# Allegro board FEMA_RF_Board.brd
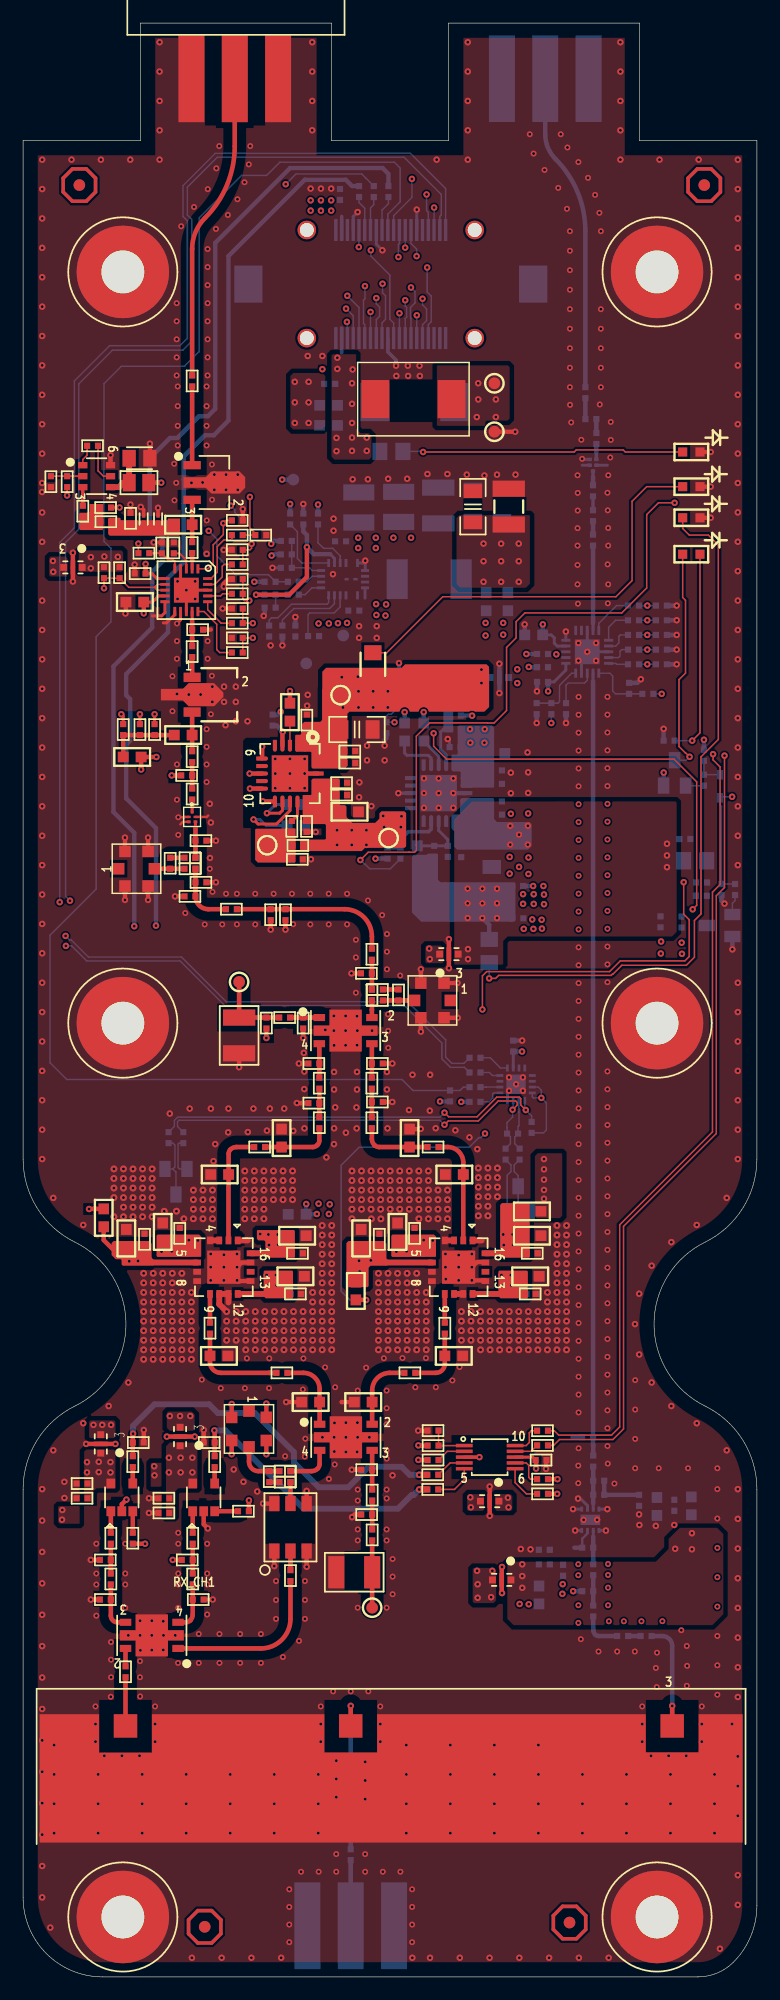
[diagram p0: board, top side]
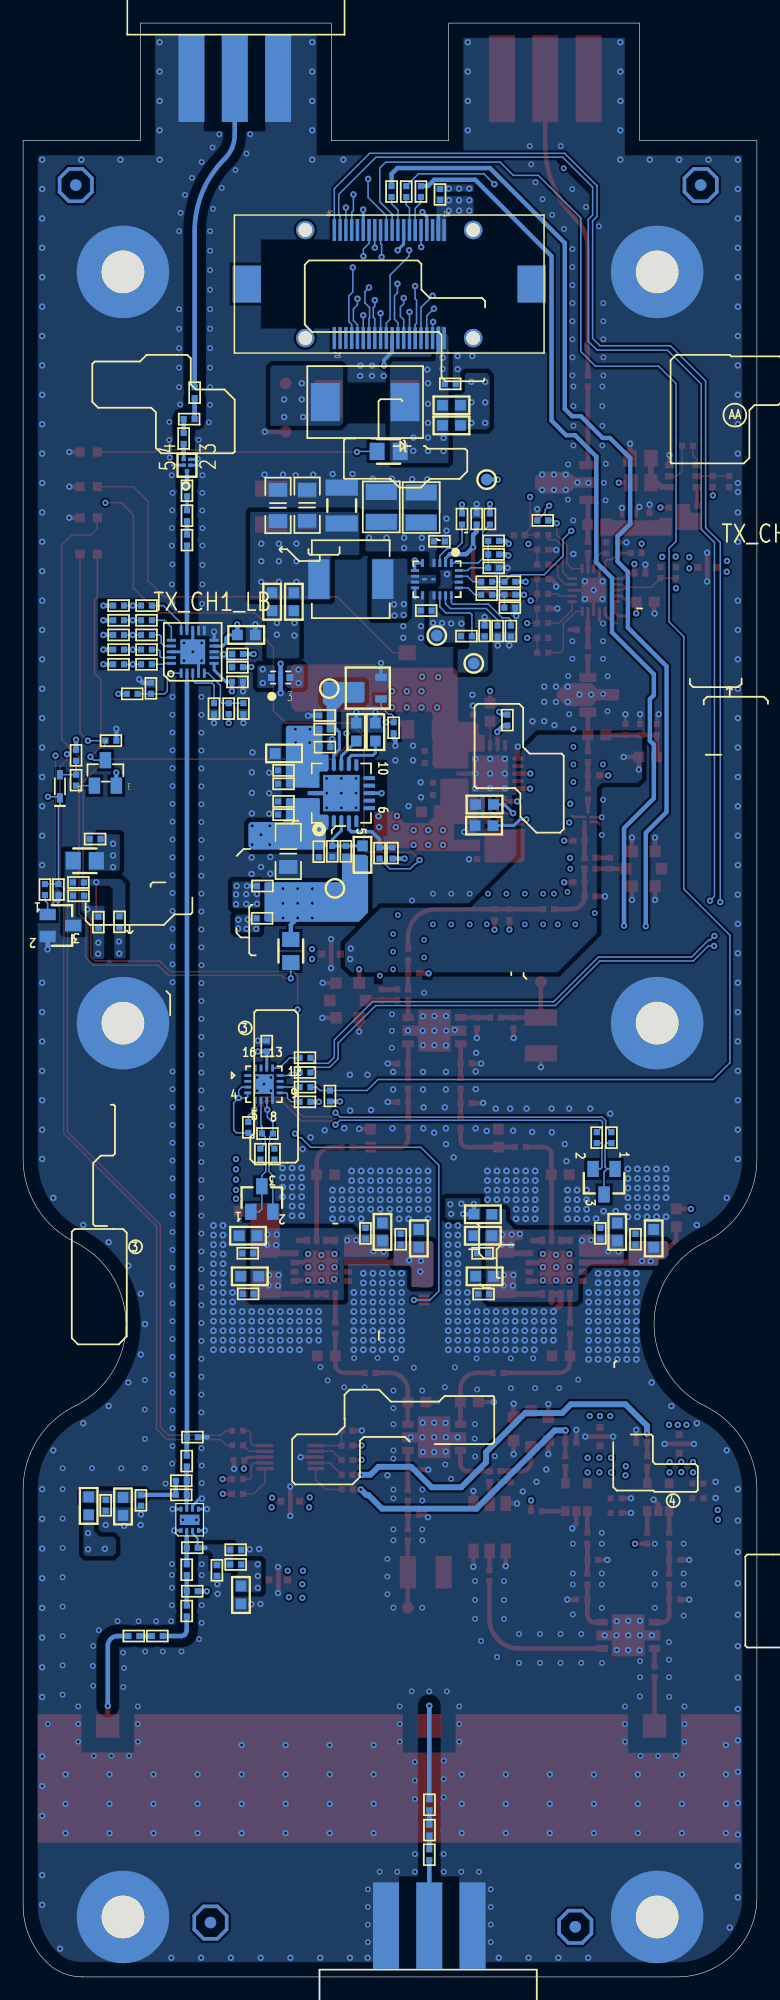
[diagram p1: board, bottom side, seen from below]

Outline 63.5 x 169 mm; copper layers: TOP, L2-GND1, L3-SIG1, L4-SIG2, L5-PWR, BOTTOM. Coordinates in mm from the lower left corner of the outline.
Outline path: 0,158.84 0,70.74 arc(1.21,66.51) 4.48,63.56 arc(8.9,56.47) 4.48,49.37 arc(1.21,46.42) 0,42.19 0,6.88 arc(2.01,2.01) 6.88,0 58.4,0 arc(60.06,0.33) 61.47,1.27 arc(62.97,3.52) 63.5,6.18 63.5,6.18 63.5,42.19 arc(62.29,46.42) 59.02,49.37 arc(54.6,56.47) 59.02,63.56 arc(62.29,66.51) 63.5,70.74 63.5,158.84 53.34,158.84 53.34,169 36.83,169 36.83,158.84 26.67,158.84 26.67,169 10.16,169 10.16,158.84 0,158.84

## Design rules (mm)
net group DP1: nets UNNAMED_101_NPN_I19_B UNNAMED_101_NPN_I19_E
net group DP3: nets UNNAMED_101_NPN_I2_B UNNAMED_101_NPN_I2_E
net group N18611317: nets N18611317 N18611323
net group 55OHM: nets LDO_5V_PG N3404767 N3408271 N3470417 N3470429 N3470503 N3470519 N3470531 N3470539 N3470663 N3470683 N17928744 N18469443 N18558711 N18558734 N18558744 N18611272 N18611312 N18611333 N18874039 N19046935 N19046998 N19047009 N19047068 N20365150 N20365219 N20365249 N20456126 N20456131 N20456136 N20456141 N20456197 N20456216 N20456296 N20458116 N20458145 N20458186 N20469972 N20476140 N20480124 N20480158 N20480184 N20480233 N20480260 N20480623 N20482043 N20482107 N20482447 N20482450 N20482724 N20482753 N20482870 N20482875 N20483231 N20489678 N20489681 N20489725 N20501837 N20501901 PA1_TX_EN PA2_TX_EN PA_EN_CNTRL PG_LDO_3P3 PG_LDO_5V PG_REG_5P7V PGA_PWR_DISABLE RF_PWR_DISABLE RF_THERMTRIP RX_ATTN_1DB RX_ATTN_2DB RX_ATTN_4DB RX_ATTN_8DB RX_ATTN_P5DB RX_ATTN_P16DB RX_NC TWI1_SCL TWI1_SDA TWI2_SCL TWI2_SDA TX_ATTN_1DB TX_ATTN_2DB TX_ATTN_4DB TX_ATTN_8DB TX_ATTN_ENB TX_ATTN_P5DB TX_ATTN_P16DB TX_NC
net group DP2: nets N20480154
net group POWER: nets 3P3V_PGA LT8640_INT_VCC N3406525 N18610577 RF_DET_F_OUT RF_DET_R_OUT
net group QWR: nets RF_RX_OUT RX_FILTER_IN RX_FILTER_OUT RX_RF_IN RX_SAWIN RX_SAWOUT
net group RF: nets N2442693 N2442695 N2442709 N2442711 N2442719 N2442759 N2442761 N2442775 N2442777 N2442783 N2442823 N2442825 N2442833 N2442881 N2442885 N2442965 N2442977 N2452276 N2452306 N2452334 N2452522 N3404619 N3406573 N3490489 N17646328 N17646554 N17673785 N18610572 N18610670 N19122168 N19122434 N19173620 N19173696 N19196616 N19638038 N19640647 N19645111 N19646465 N19674332 N19674512 N20449161 N20449168 N20449298 N20449320 N20460527 N20476316 PA_CON RF_CON RF_CON_C RF_CPL_OUT RF_DET_FWR_IN RF_DET_REV_IN RF_INTANT RF_INTANT_C RF_OUT RX_ATTN_IN RX_ATTN_OUT RX_LNA_IN RX_LNA_OUT TX_ATT_IN TX_ATT_OUT TX_PA_OUT TX_PREAMP_OUT TX_RF_IN TX_RF_IN_18614129 TX_RF_IN_C TX_RF_OUT

## Placement (name value [footprint] x y rotation side)
C16  0.1uF  [C0402]  44.82 44.7 180 top
C67  NFM18PC225B1A3D  [EMIFIL_NFM18PC225B1A3B]  41.22 112.39 180 bottom
C1506  1000pF  [C0201]  10.43 126.11 90 top
C1519  100nF  [C0201]  11.68 126.11 90 top
C2215  33pF  [C0402]  14.63 123.63 90 top
C2224  10000pF  [C0603]  9.67 118.92 180 top
C2230  10pF  [C0402]  18.03 92.35 0 top
C2233  2.7PF  [C0402]  21.42 91.88 270 top
C2237  47pF  [C0402]  14.63 102.32 270 top
C2240  2.2uF  [C0402]  8.66 107.89 90 top
C2241  10pF  [C0402]  10.11 107.89 90 top
C2242  0.1uF  [C0402]  11.38 107.89 90 top
C2400  10uF  [C0603]  29.25 63.88 90 bottom
C2401  2.2uF  [C0402]  30.83 63.8 90 bottom
C2402  10000pF  [C0603]  29.25 63.88 90 top
C2403  33pF  [C0402]  30.83 63.8 90 top
C2404  33pF  [C0402]  43.88 59.07 0 top
C2405  10000pF  [C0603]  43.88 60.6 0 top
C2406  2.2uF  [C0402]  44.03 59.08 0 bottom
C2407  10uF  [C0603]  43.88 60.6 0 bottom
C2410  100pF  [C0402]  35.48 71.78 0 top
C2411  12pF  [C0402]  33.47 52.25 180 top
C2413  10000pF  [C0603]  37.32 69.41 180 top
C2414  10000pF  [C0603]  37.27 53.72 0 top
C2415  33pF  [C0402]  33.87 64.31 90 top
C2416  10000pF  [C0603]  32.4 64.44 90 top
C2417  2.2uF  [C0402]  33.87 64.31 90 bottom
C2418  10uF  [C0603]  32.4 64.44 90 bottom
C2419  10uF  [C0603]  8.93 63.88 90 bottom
C2420  2.2uF  [C0402]  10.51 63.8 90 bottom
C2421  10000pF  [C0603]  8.93 63.88 90 top
C2422  33pF  [C0402]  10.51 63.8 90 top
C2423  33pF  [C0402]  23.74 62.59 0 top
C2424  10000pF  [C0603]  23.71 64.11 0 top
C2425  2.2uF  [C0402]  23.74 62.59 0 bottom
C2426  10uF  [C0603]  23.71 64.11 0 bottom
C2432  10000pF  [C0603]  17.01 69.41 180 top
C2433  10000pF  [C0603]  16.95 53.72 0 top
C2435  33pF  [C0402]  23.56 59.07 0 top
C2436  10000pF  [C0603]  23.56 60.6 0 top
C2437  2.2uF  [C0402]  23.65 59.07 0 bottom
C2438  10uF  [C0603]  23.56 60.6 0 bottom
C2439  100pF  [C0402]  20.47 71.78 180 top
C2500  100pF  [C0402]  53.3 41.22 90 bottom
C2501  10000pF  [C0603]  54.86 40.69 270 bottom
C2610  100pF  [C0402]  5.1 42.67 180 top
C2612  33pF  [C0402]  9.97 46.22 0 top
C2613  100pF  [C0402]  12.18 41.4 180 top
C2615  33pF  [C0402]  16.1 46.22 180 top
C3500  10uF  [CAPC3225X270N]  29.05 127.1 90 bottom
C3501  10uF  [CAPC3225X270N]  32.5 127.15 90 bottom
C3502  1uF  [C0402]  27.47 124.18 180 bottom
C3503  0.1uF  [C0402]  25.52 126.11 90 bottom
C3504  1uF  [C0402]  28.62 118.19 0 bottom
C3505  22uF  [CC1210]  35.93 127.27 90 bottom
C3506  47uF  [C1206]  38.92 127.3 90 bottom
C3507  47uF  [C1206]  38.92 127.17 90 top
C3508  47uF  [C1206]  41.44 127.28 90 bottom
C3509  22uF  [CC1210]  42.03 127.18 90 top
C3510  1uF  [C0402]  24.25 126.11 90 bottom
C3511  0.1uF  [C0402]  21.29 116.41 270 bottom
C3512  10pF  [C0402]  22.78 124.21 180 bottom
C3600  10uF  [C0603]  40.91 105.83 0 bottom
C3604  10000pF  [C0603]  34.13 97.06 90 bottom
C3608  22uF  [C1206]  40.55 97.36 270 bottom
C3609  10uF  [C0603]  33.01 107.68 90 bottom
C3610  10000pF  [C0603]  34.67 107.68 90 bottom
C4100  10uF  [C0603]  28.25 100.78 0 top
C4104  10000pF  [C0603]  23.09 109.4 270 top
C4108  22uF  [C1206]  28.9 107.9 0 top
C4109  10uF  [C0603]  23.57 101.41 0 bottom
C4110  10000pF  [C0603]  23.61 99.58 0 bottom
C4200  0.1uF  [C0402]  57.27 98.42 0 bottom
C4317  4.7uF  [C0805]  10.07 131.36 180 top
C4393  47pF  [C0402]  8.86 26.39 270 top
C4401  47pF  [C0402]  28.34 14.88 270 bottom
C4413  10pF  [C0402]  30.66 84.46 0 top
C4414  10pF  [C0402]  22.66 43.75 180 top
C4421  100pF  [C0402]  36.49 56.11 270 top
C4422  100pF  [C0402]  16.17 56.11 270 top
C4425  10pF  [C0402]  14.63 138.05 270 top
C4447  47pF  [C0402]  30.18 84.94 270 top
C4449  47pF  [C0402]  23.14 34.71 270 top
C4465  10pF  [C0402]  14.44 95.85 180 top
C4470  12pF  [C0402]  22.4 52.25 0 top
C4478  10pF  [C0402]  28.35 10.57 270 bottom
C4488  47pF  [C0402]  23.14 43.27 270 top
C4499  100pF  [C0402]  49.34 44.62 270 bottom
C4500  20pF  [C0402]  49.34 35.22 270 bottom
C4501  33pF  [C0402]  48.86 33.36 180 bottom
C4502  68pF  [C0402]  46.73 35.17 270 bottom
C4504  1000pF  [C0402]  45.1 36.95 180 bottom
C4505  1.8pF  [C0402]  48.85 46.69 180 bottom
C4516  10000pF  [C0603]  44.65 33.03 270 bottom
C4519  100pF  [C0402]  14.63 114.64 270 top
C4520  100pF  [C0402]  14.63 105.55 270 top
C4522  100pF  [C0402]  30.21 38.23 270 top
C4523  47pF  [C0402]  7.59 37.94 90 top
C4524  47pF  [C0402]  14.68 37.94 90 top
C4530  47pF  [C0402]  53.92 29.48 0 bottom
C4531  100pF  [C0402]  49.61 133.07 270 bottom
C4532  100pF  [C0402]  49.32 128.55 270 bottom
C4533  100pF  [C0402]  49.32 124.28 270 bottom
C4540  100pF  [C0402]  48.66 137.03 270 bottom
C4569  0.1uF  [C0402]  37.91 97.33 270 bottom
C4570  0.1uF  [C0402]  40.96 100.53 0 bottom
C4571  0.1uF  [C0402]  40.96 101.68 0 bottom
C4572  0.1uF  [C0402]  37.38 106.38 180 bottom
C4573  0.1uF  [C0402]  40.96 103.2 0 bottom
C4574  0.1uF  [C0402]  40.96 104.36 0 bottom
C4581  0.1uF  [C0402]  24.53 99.52 270 top
C4582  0.1uF  [C0402]  27.56 103.29 0 top
C4583  0.1uF  [C0402]  27.56 102.23 0 top
C4584  0.1uF  [C0402]  24.55 108.71 90 top
C4585  0.1uF  [C0402]  28.27 106.04 0 top
C4586  0.1uF  [C0402]  28.27 105 0 top
C4625  47pF  [C0402]  28.34 12.7 270 bottom
C4630  10pF  [C0402]  49.13 134.75 180 bottom
C4631  10pF  [C0402]  49.32 126.39 90 bottom
C4638  47pF  [C0402]  51.89 29.48 0 bottom
C4641  18pF  [C0402]  9.29 126.17 90 top
C4643  18pF  [C0402]  10.13 121.39 180 top
C4645  0.1uF  [C0402]  5.1 41.4 180 top
C4646  0.1uF  [C0402]  12.18 40.13 180 top
C4650  18pF  [C0402]  56.35 40.79 270 bottom
C4665  18pF  [C0402]  15.1 116.54 0 top
C4666  18pF  [C0402]  14.15 103.92 180 top
C4671  1000PF  [C0402]  42.36 72.95 180 bottom
C4672  1000PF  [C0402]  44.01 73.48 270 bottom
C4682  10pF  [C0402]  14.44 96.8 0 top
C4685  10pF  [C0402]  30.66 85.41 0 top
C4686  10pF  [C0402]  22.66 42.8 0 top
C4730  33pF  [C0402]  13.55 64.31 90 top
C4731  10000pF  [C0603]  12.08 64.44 90 top
C4732  2.2uF  [C0402]  13.55 64.31 90 bottom
C4733  10uF  [C0603]  12.08 64.44 90 bottom
C4734  33pF  [C0402]  44.06 62.59 0 top
C4735  10000pF  [C0603]  44.03 64.11 0 top
C4736  2.2uF  [C0402]  44.06 62.59 0 bottom
C4737  10uF  [C0603]  44.03 64.11 0 bottom
C4738  NFM18PC225B1A3D  [EMIFIL_NFM18PC225B1A3B]  4.31 121.92 180 top
C4740  NFM18PC225B1A3D  [EMIFIL_NFM18PC225B1A3B]  40.38 41.15 180 top
C4741  NFM18PC225B1A3D  [EMIFIL_NFM18PC225B1A3B]  36.85 88.47 0 top
C4742  NFM18PC225B1A3D  [EMIFIL_NFM18PC225B1A3B]  41.42 34.34 180 top
C4743  18pF  [C0402]  44.95 112.01 180 bottom
C4744  10000pF  [C0603]  44.19 116.08 180 bottom
C4745  0.1uF  [C0402]  42.41 80.52 90 bottom
C4746  0.1uF  [C0402]  27.42 154.18 270 bottom
C4747  NFM18PC225B1A3D  [EMIFIL_NFM18PC225B1A3B]  6.72 46.1 90 top
C4748  NFM18PC225B1A3D  [EMIFIL_NFM18PC225B1A3B]  13.58 46.74 90 top
C4749  0.1uF  [C0402]  26.53 137.79 180 bottom
CON2  19S101-40ML5  [SMA_1P5_18X18_3N]  18.32 165.8 90 top
CON4  19S101-40ML5  [SMA_1P5_18X18_3N]  45.18 165.82 90 bottom
CON5  19S101-40ML5  [SMA_1P5_18X18_3N]  28.35 2.81 270 bottom
D5  B530C-13-F  [B530C_13_F]  33.9 136.22 180 bottom
D6  RB751S40T5G  [SOD523F_2P_1_30X0_90_0_70MM]  60.32 102.99 90 bottom
D10  SMDJ16CA  [SMDJ36CA]  33.77 136.47 180 top
D10116  LED  [LED_LTST-C190]  57.83 126.21 0 top
D10126  LED  [LED_LTST-C190]  57.83 131.9 0 top
D10127  LED  [LED_LTST-C190]  57.83 123.06 0 top
D10128  LED  [LED_LTST-C190]  57.83 128.91 0 top
FB2202  120E  [FB0603]  9.44 105.52 0 top
FB2400  120E  [FB0603]  44.03 66.22 180 top
FB2401  120E  [FB0603]  23.71 65.96 180 bottom
FB2500  120E  [FB0603]  57.83 40.74 90 bottom
FB3409  100E / 3A  [FB0603]  26.43 135.94 180 bottom
FB3410  100E / 3A  [FB0603]  26.43 134.2 180 bottom
FB3412  120E  [FB0603]  28.79 59.33 90 top
FB3413  120E  [FB0603]  6.98 65.66 270 top
FB6322  75E  [FB0402]  7.16 125.87 0 top
FB6332  100E / 3A  [FB0603]  41.95 118.95 270 bottom
FB6333  100E / 3A  [FB0603]  40.07 118.95 270 bottom
FL2503  FAR-F5KA-897M50-D4DC  [FLT_FAR-F6KA-1G5754-L4AJ]  49.32 130.76 90 bottom
FL2703  UPD008A  [FIL_CER0574A]  8.86 21.89 0 top
FL3310  SAFFB942MAN0F0A  [FIL_SAFFB942MAN0F0A]  14.63 100.34 270 top
J20  FX23L-50-P-0.5SV10  [CON_40P_22_50X7_90_17_10MM]  31.82 146.43 0 bottom
L30  2.2uH  [L0805]  10.03 129.25 180 top
L1516  150nH  [L0603]  13.85 125.62 0 top
L2212  9.1 nH  [L0402]  14.44 93.46 180 top
L2214  100nH  [L0603]  13.85 107.42 0 top
L2400  1nH  [L0402]  30.18 73.89 270 top
L2402  4.9nH  [L0603]  33.44 72.56 90 top
L2403  4.9nH  [L0603]  29.43 49.72 180 top
L2405  1nH  [L0402]  25.63 73.89 270 top
L2406  4.9nH  [L0603]  22.37 72.56 90 top
L2407  4.9nH  [L0603]  24.88 49.72 180 top
L2500  8.2nH  [L0402]  49.81 41.7 180 bottom
L3500  3.3uH  [INDM6965X300N]  35.14 120.9 0 bottom
L3502  2.2nH  [L0402]  49.34 31.65 270 bottom
L3503  15nH  [L0402]  48.86 37.12 180 bottom
MH1  Mounting_Hole  [MTG370X800]  54.86 5.18 0 top
MH3  Mounting_Hole  [MTG370X800]  54.86 82.5 0 top
MH5  Mounting_Hole  [MTG370X800]  8.63 5.18 0 top
MH6  Mounting_Hole  [MTG370X800]  8.63 147.48 0 top
MH7  Mounting_Hole  [MTG370X800]  8.63 82.5 0 top
MH8  Mounting_Hole  [MTG370X800]  54.86 147.48 0 top
NOREF  -  [unnamed]  4.87 154.99 0 top
NOREF#2  -  [unnamed]  15.72 4.33 0 top
NOREF#3  -  [unnamed]  47.29 4.7 0 top
NOREF#4  -  [unnamed]  58.94 154.99 0 top
NOREF#5  -  [unnamed]  47.29 4.7 180 bottom
NOREF#6  -  [unnamed]  15.72 4.33 180 bottom
NOREF#7  -  [unnamed]  4.87 154.99 180 bottom
NOREF#8  -  [unnamed]  58.94 154.99 180 bottom
Q1  2N7002L  [SM_3_TRANS_SOT23_120X55_50H]  33.67 111.48 90 bottom
Q2  MMBT3906-7-F  [SOT23_3P_3_10X1_50_1_20MM]  56.38 104.14 180 bottom
Q3  TRANS NPN/PNP 20V 4A/3.5A SOT23  [SOT95P280X140-6N]  6.36 129.81 270 top
Q40  MMBT3904  [SOT23]  42.84 67.28 180 bottom
Q41  MMBT3904  [SOT23]  13.22 68.78 0 bottom
Q4200  MMBT2222ALT1  [SOT23]  60.27 90.94 270 bottom
R10  10K  [R0402]  35.47 44.7 0 top
R49  1K  [R0402]  6.01 132.44 180 top
R60  10K  [R0402]  35.47 45.96 180 top
R61  0E  [R0402]  29.07 154.43 270 bottom
R62  0E  [R0402]  30.34 154.43 270 bottom
R63  0E  [R0402]  31.61 154.43 270 bottom
R82  560E  [R0402]  55.9 106.93 180 bottom
R83  10K  [R0402]  58.92 103.52 270 bottom
R85  100K  [R0402]  58.92 105.66 270 bottom
R513  620E  [R0805]  31.87 131.95 0 bottom
R850  0E  [R0402]  22.63 82.98 180 top
R851  0E  [R0402]  24.24 82.51 90 top
R852  0E  [R0402]  21.05 82.51 90 top
R853  0E  [R0402]  30.21 41.68 270 top
R854  0E  [R0402]  29.73 43.87 0 top
R855  0E  [R0402]  29.73 39.99 0 top
R874  11.8E  [R0402]  7.59 34.42 90 top
R875  442E  [R0402]  7.12 32.64 180 top
R876  442E  [R0402]  7.12 36.07 180 top
R877  71.5E  [R0402]  14.68 34.42 90 top
R878  97.6E  [R0402]  15.15 32.64 0 top
R879  97.6E  [R0402]  14.2 36.07 180 top
R942  3K  [R0402]  18.53 125.98 0 top
R1181  0E  [R0402]  12.72 96.33 270 top
R1182  0E  [R0402]  32.49 84.94 270 top
R1183  0E  [R0402]  21.3 43.27 270 top
R1650  300  [R0402]  49.81 42.92 180 bottom
R1651  9.1k  [R0402]  45.1 35.68 0 bottom
R1750  0E  [R0402]  42.97 71.17 270 bottom
R1751  0E  [R0402]  41.75 71.17 270 bottom
R1752  0E  [R0402]  12.59 72.59 270 bottom
R1753  0E  [R0402]  13.86 72.59 270 bottom
R2219  3K  [R0402]  12 123.61 90 top
R2220  1K  [R0402]  8.35 121.46 90 top
R2223  0E  [R0402]  30.18 88.46 90 top
R2224  0E  [R0402]  14.91 96.33 90 top
R2225  887E  [R0402]  15.39 98.28 0 top
R2226  887E  [R0402]  15.39 94.68 0 top
R2227  887E  [R0402]  22.7 91.88 270 top
R2228  887E  [R0402]  29.71 86.8 180 top
R2251  10K  [R0402]  13.04 123.61 90 top
R2613  10K  [R0402]  9.49 37.94 90 top
R2614  100E  [R0402]  9.49 44.57 90 top
R2615  10K  [R0402]  19.07 40.28 180 top
R2616  100E  [R0402]  16.58 44.57 90 top
R3500  100K  [R0402]  25.14 115.98 180 bottom
R3501  10k  [R0402]  21.38 119.56 0 bottom
R3502  0E  [R0402]  23.38 119.56 0 bottom
R3503  0E  [R0402]  23.11 126.11 90 bottom
R3504  12k  [R0402]  23.56 116.42 90 bottom
R3505  0E  [R0402]  23.38 120.68 180 bottom
R3506  649k  [R0402]  22.78 123.04 180 bottom
R3507  10k  [R0402]  21.38 118.44 180 bottom
R3508  41.2k  [R0402]  22.44 116.41 270 bottom
R3509  133k  [R0402]  22.78 121.88 180 bottom
R3520  10K  [R0402]  21.37 120.68 0 bottom
R3600  29.4K  [R0402]  37.41 107.93 180 bottom
R3601  105K  [R0402]  35.58 97.36 90 bottom
R3602  100K  [R0402]  31.54 97.21 90 bottom
R3603  0E  [R0402]  32.66 97.21 270 bottom
R3604  10K  [R0402]  37.41 109.11 0 bottom
R3606  20K  [R0402]  36.74 97.36 270 bottom
R4100  29.4K  [R0402]  23.78 97.87 180 top
R4101  0E  [R0402]  23.26 99.52 90 top
R4102  10K  [R0402]  23.73 96.67 0 top
R4103  100K  [R0402]  21.59 108.71 270 bottom
R4200  120E  [R0805]  58.16 96.55 0 bottom
R4202  0E  [R0402]  58.72 94.67 180 bottom
R4203  0E  [R0402]  58.7 93.52 180 bottom
R5526  49.9E  [R1210]  18.69 81.43 90 top
R10784  220  [RC0805]  40.33 88.74 270 bottom
R10888  10K  [R0402]  3.82 129.34 270 top
R10975  2.2K  [R0402]  61.61 94.06 270 bottom
R10989  3K  [R0402]  20.57 124.71 0 top
R10990  3K  [R0402]  18.53 123.44 180 top
R10991  3K  [R0402]  18.53 115.82 180 top
R10992  3K  [R0402]  18.53 118.36 180 top
R10993  3K  [R0402]  18.53 120.9 180 top
R10994  1K  [R0402]  10.45 123.15 0 top
R11038  49.9E  [R1210]  28.66 35 0 top
R11061  20K  [R0402]  60.44 94.06 270 bottom
R11089  10K  [R0402]  55.16 91.26 90 bottom
R11090  10K  [R0402]  56.99 91.24 90 bottom
R11097  1K  [R0402]  7 121.46 270 top
R11130  0E  [R0402]  5.16 126.78 90 top
R11132  0E  [R0402]  7.14 127.09 0 top
R11158  442E  [R0402]  30.66 79.01 0 top
R11159  11.8E  [R0402]  30.18 77.31 270 top
R11160  442E  [R0402]  30.66 75.68 0 top
R11161  442E  [R0402]  25.16 79.01 180 top
R11162  442E  [R0402]  25.16 75.58 180 top
R11163  11.8E  [R0402]  25.63 77.31 270 top
R11255  10K  [R0402]  36.95 76.2 90 bottom
R11256  0E  [R0402]  39.11 78.23 180 bottom
R11347  0E  [R0402]  42.79 94.36 0 bottom
R11348  0E  [R0402]  42.82 91.57 0 bottom
R11349  10K  [R0402]  31.44 108.05 270 bottom
R11351  10K  [R0402]  18.53 125.98 180 bottom
R11352  10K  [R0402]  54.06 110.98 180 bottom
R11353  3K  [R0402]  52.44 111.46 90 bottom
R11354  1K  [R0402]  44.95 114.43 0 bottom
R11355  10K  [R0402]  46.98 109.7 270 bottom
R11356  1K  [R0402]  45.71 109.7 90 bottom
R11357  3K  [R0402]  44.44 109.7 270 bottom
R11358  1K  [R0402]  44.95 113.28 180 bottom
R11359  3K  [R0402]  55.24 118.62 0 bottom
R11360  3K  [R0402]  55.24 117.35 0 bottom
R11361  3K  [R0402]  55.24 116.08 0 bottom
R11362  3K  [R0402]  55.24 114.81 0 bottom
R11363  3K  [R0402]  55.24 113.54 0 bottom
R11364  0E  [R0402]  18.53 124.71 0 top
R11365  0E  [R0402]  18.53 122.17 0 top
R11366  0E  [R0402]  18.53 119.63 0 top
R11367  0E  [R0402]  18.53 117.09 0 top
R11368  0E  [R0402]  18.53 114.55 0 top
R11369  0E  [R0402]  52.82 113.54 0 bottom
R11370  0E  [R0402]  52.82 114.81 0 bottom
R11371  0E  [R0402]  52.82 116.08 0 bottom
R11372  0E  [R0402]  52.82 117.35 0 bottom
R11373  0E  [R0402]  52.82 118.62 0 bottom
R11374  0E  [R0402]  39.11 79.5 180 bottom
R11375  0E  [R0402]  39.11 76.96 180 bottom
R11376  10K  [R0402]  39.11 75.69 180 bottom
R11377  10K  [R0402]  35.47 47.25 180 top
R11378  0E  [R0402]  44.95 45.97 0 top
R11379  0E  [R0402]  44.95 47.24 0 top
R11380  1K  [R0402]  35.45 43.43 0 top
R11381  1K  [R0402]  35.45 42.16 0 top
R11382  10K  [R0402]  44.95 41.78 180 top
R11383  10K  [R0402]  44.95 43.05 180 top
R11384  220  [RC0805]  30.27 113.54 90 top
R11385  100K  [R0402]  2.4 129.34 270 top
TP57  T POINT R  [TP_40C]  27.7 116.03 0 bottom
TP58  T POINT R  [TP_40C]  23.38 129.51 0 bottom
TP74  T POINT R  [TP_40C]  36.52 94.16 0 bottom
TP85  T POINT R  [TP_40C]  31.63 98.51 90 top
TP86  T POINT R  [TP_40C]  27.47 110.87 0 top
TP2400  T POINT R  [TP_40C]  18.69 86.06 180 top
TP2403  T POINT R  [TP_40C]  30.21 31.94 0 top
TP3035  T POINT R  [TP_40C]  24.5 113.61 180 bottom
TP3037  T POINT R  [TP_40C]  21.12 97.89 90 top
TP3039  T POINT R  [TP_40C]  37 111.44 90 bottom
TP3041  T POINT R  [TP_40C]  40.78 137.85 0 top
TP3042  T POINT R  [TP_40C]  40.78 133.65 0 top
U5  ADS1015IDGST  [SOP_10P_3_10X3_10_1_10MM]  40.38 44.96 0 top
U1500  PGA-102+  [SOTFL150P409X160-3N]  16.55 129.26 270 top
U2203  SKY65162-70LF  [SOT89H63]  14.63 110.91 270 top
U2230  DAT-31R5A-PP+  [QFN50P400X400X85-21N_A]  14.13 119.95 270 top
U2400  SKY66298-11  [QFN20P0X200X200-17N]  37.69 61.39 270 top
U2402  X3C09F1-03S  [ANAREN_X3C09F1-20S]  27.91 81.85 0 top
U2403  X3C09F1-03S  [ANAREN_X3C09F1-20S]  27.93 46.67 0 top
U2404  SKY66298-11  [QFN20P0X200X200-17N]  17.37 61.39 270 top
U2605  X3C09F1-20S  [ANAREN_X3C09F1-20S]  11.13 29.54 180 top
U2606  LTC5505  [SOT23_0P95_2P90X1P75_5N]  8.54 41.48 0 top
U2607  LTC5505  [SOT23_0P95_2P90X1P75_5N]  15.63 41.48 0 top
U3500  LT8640IUDC  [QFN50P300X400X80-20N]  27.69 120.9 180 bottom
U3600  TPS7A8300  [QFN65P500X500X100-21N_A]  35.96 102.39 90 bottom
U4100  TPS7A8300  [QFN65P500X500X100-21N_A]  23.09 104.09 270 top
U7122  MM8430-2610  [SMA_MM8430-2610]  35.42 84.46 180 top
U7123  MM8430-2610  [SMA_MM8430-2610]  19.55 47.4 270 top
U7142  MM8430-2610  [SMA_MM8430-2610]  9.81 95.85 0 top
U7146  CES40942MDCB000  [P1161C]  23.14 38.89 270 top
U7155  SKY67151-396LF  [DFN_8P_2X2_80]  49.09 39.54 90 bottom
U7156  DAT-31R5A-PP+  [QFN50P400X400X85-21N_A]  48.82 114.62 90 bottom
U7157  TMP464AIRGTR  [VQFN_0P5_3P1X3P1_17N]  42.66 77.22 180 bottom

## Library data of the parts
C16 C2242 = CAP_CER_0.1UF_10V_10%_X5R_0402
C67 C4738 C4740-C4742 C4747 C4748 = NFM18PC_0
C1506 = CAP CER 1000PF 16V X7R 0201
C1519 = CAP_CER_100nF_0201_0
C2215 = CAP_CER_33pF_50V_5%_X7R_5
C2224 C2402 C2405 C2416 C2421 C2424 C2436 C2501 C4516 C4731 C4735 C4744 = CAP_CER_10nF_0603_1
C2230 C4478 C4630 C4631 = CAP_CER_10pF_0402_2
C2233 = CAP_CER_0.7PF_0402_25V
C2237 C4393 C4401 C4447 C4449 C4488 C4523 C4524 C4530 C4625 C4638 = CAP_47pF_0
C2240 C2401 C2406 C2417 C2420 C2425 C2437 C4732 C4736 = CAP_CER_0.2uF_0402_16V
C2241 C4413 C4414 C4425 C4465 C4682 C4685 C4686 = CAP_CER_10pF_0402_3
C2400 C2407 C2418 C2419 C2426 C2438 C3600 C3609 C4100 C4109 C4733 C4737 = CAP_CER_10UF_0603_0
C2403 C2404 C2415 C2422 C2423 C2435 C2610 C2612 C2613 C2615 C4499 C4501 C4730 C4734 = CAP_CER_33pF_50V_5%_X7R_6
C2410 C2439 C4421 C4422 C4519 C4520 C4522 C4531-C4533 C4540 = CAP_CER_100PF_0402_0
C2411 C4470 = CAP CER 6.8PF 16V NP0 0402
C2413 C2414 C2432 C2433 = CAP_CER_0603_DNP_0
C2500 = CAP_CER_33pF_50V_5%_X7R_7
C3500 C3501 = CAP_CER_10UF_1210_0
C3502 C3504 C3510 = CAP_CER_1UF_16V_10%_X6S_0
C3503 C3511 = CAP_CER_2.1uF_0402_25V
C3505 C3509 = CAP_CER_22UF_1210_0
C3506-C3508 = CAP_POl_47uF_1206_6.3V: Tolerance: tol*
C3512 = CAP_CER_10pF_0402_4
C3604 C3610 C4104 C4110 = CAP_CER_10nF_0603_16V
C3608 C4108 = CAP_CER_22UF_16V_10%_X6S_0: Tolerance: tol*
C4200 C4569-C4574 C4581-C4586 C4745 C4746 C4749 = CAP_CER_4.1uF_0402_25V
C4317 = CAP CER 4.7UF 16V X7R 0805
C4500 = CAP_CER_33pF_50V_5%_X7R_8
C4502 = CAP_CER_33pF_50V_5%_X7R_9
C4504 = CAP_CER_33pF_50V_5%_X7R_10
C4505 = CAP_CER_33pF_50V_5%_X7R_11
C4641 C4643 C4645 C4646 C4650 C4665 C4666 C4743 = CAP_CER_18PF_0402_1
C4671 = CAP_CER_3.1uF_0402_25V
C4672 = CAP_CER_1.1uF_0402_25V
CON2 = UFLR_0
CON4 = UFLR_1
CON5 = UFLR_2
D5 = BZX84C3V0/SOT_3
D6 = RB751S40
D10 = SMDJ36CA
D10116 D10128 = LED_GREEN
D10126 D10127 = LED_wp117
FB2202 = FB_3.0A_120OHM_0603
FB2400 FB2401 FB2500 FB3412 FB3413 = FB_2.0A_120OHM_0603
FB3409 FB3410 FB6332 FB6333 = Ferrite Bead
FB6322 = FB_200mA_75OHM_0402
FL2503 = FAR-F5KA-897M50-D4DC_1
FL2703 = Duplexer_Band8_CER0574A_2
FL3310 = SAFFB942MAN0F0A
J20 = FX23L-50-P-0_1.5SV10
L30 = FIXED IND 2.2uH 10mA 1.75 OHM
L1516 = INDUCTOR_150nH_150mA_0
L2212 = INDUCTOR_0.1nH_300mA_0402
L2214 = INDUCTOR_100nH_200mA_0603
L2400 L2405 = INDUCTOR_1nH_300mA_0402
L2402 L2403 L2406 L2407 = INDUCTOR_0603_DNP
L2500 = INDUCTOR_68nH_200mA_0402
L3500 = FIXED IND 3.3UH 6A 30 MOHM SMD
L3502 = INDUCTOR_68nH_200mA_0
L3503 = INDUCTOR_15nH_250mA_0
MH1 MH3 MH5-MH8 = Mounting_Hole_0
Q1 = 2N7002L
Q2 = MMBT3906-7-F_0
Q3 = TRANS NPN/PNP 20V 4A/3.5A SOT23
Q40 Q41 = NPN#1
Q4200 = MMBT2222ALT1
R10 R60 R11377 = R_2
R49 = RES_1K_0402_0: signal model: DEFAULT_RESISTOR_3e-012OHM_2_1
R61-R63 = RES_0ohm_0402_1
R82 = RES_560E_0402
R83 = RES_10K_OHM_1/16W_1%_0402_SMD_1
R85 R11385 = RES_10K_OHM_1/16W_1%_0402_SMD
R513 R4200 = RES_10K_0402_63mW
R850-R855 R1181-R1183 R1750-R1753 R2223 R2224 R11130 R11132 R11256 R11347 R11348 R11374 R11375 R11378 R11379 = RES_0ohm_0402_0
R874 R11159 R11163 = RES_2.8ohm_0402_63mW
R875 = RES_442ohm_0402_1
R876 R11158 R11160-R11162 = RES_442ohm_0402_2
R877 = RES_0.5ohm_0402_63mW
R878 R879 = RES_0.6ohm_0402_63mW
R942 R2219 R10989-R10993 R11353 R11357 R11359-R11363 = RES SMD 3K OHM 5% 1/16W 0402_0
R1650 = RES_1K_0402_7
R1651 = RES_1K_0402_6
R2220 R11089 R11090 R11097 R11354 R11356 R11358 = RES_1K_0402_11
R2225-R2228 = RES SMD 887 OHM 1% 1/16W 0402
R2251 R2613 R11255 R11351 R11352 R11355 R11376 R11382 R11383 = RES_10K_0402_6
R2614 R2616 = RES_100ohm_0402_0
R2615 = RES_10K_0402_7
R3500 = RES_100K_0402_0.063W
R3501 R3507 = RES_10K_0402_0.1W
R3502 R3503 R3505 R11364-R11373 = RES_0ohm_0402_JUMPER
R3504 = RES_12K_0402_0.063W
R3506 = RES_649K_0402_0.063W
R3508 = RES_41.2K_0402_0.063W
R3509 = RES_133K_0402_0.063W
R3520 = RES_10K_0402_63mW_DNP_1
R3600 R4100 = RES_29.4K_0402_0.063W
R3601 = RES_105K_0402_0.063W
R3602 R4103 = RES_100K_0402_0
R3603 R4101 = RES_0ohm_0402_2
R3604 R4102 R11349 = RES_10K_0402_10
R3606 = RES_20K_0402_0
R4202 R4203 = RES_0ohm_0402_63mW
R5526 R11038 = RES SMD 49.9 OHM 1% 1/10W 0402
R10784 R11384 = RES_100K_1/16W_5%_0402_SMD_1
R10888 = RES SMD 10K OHM 5% 1/16W 0402_1
R10975 = RES_2.2K_0402_63mW
R10994 = RES_1K_0402_13
R11061 = RES_1K_0402_3
R11380 R11381 = RES_1K_0402_0
TP57 TP58 TP74 TP85 TP86 TP2400 TP2403 TP3035 TP3037 TP3039 TP3041 TP3042 = T POINT R
U5 = ADS1015IDGSR_0
U1500 = PGA-102+
U2203 = MGA-30689
U2230 U7156 = DAT-31R5A-PP+_0
U2400 U2404 = ALM-32120_2
U2402 = X3C09F1-03S_SPL_0
U2403 = X3C09F1-03S_COM_0
U2605 = X3C09F1-20S_0
U2606 U2607 = LMH2121_1
U3500 = LT8640IUDC
U3600 U4100 = TPS7A8300_0
U7122 U7123 U7142 = MM8430-2610
U7146 = CES40942MDCB000
U7155 = SKY67151-396LF
U7157 = TMP464AIRGTR_3

## Footprints (pads in the part's own frame, mm; a bottom-side part is the same pattern mirrored in y, then rotated)
ANAREN_X3C09F1-20S
  rect 0.99x0.61 smd: 1(-2.273,1.13) 2(2.273,1.13) 3(2.273,-1.13) 4(-2.273,-1.13)
  custom 5.54x3.63 smd: 5(0,0)
B530C_13_F
  rect 2.5x3.3 smd: 1(-3.45,0) 2(3.45,0)
C0201
  rect 0.381x0.305 smd: 1(-0.305,0) 2(0.305,0)
C0402
  rect 0.533x0.533 smd: 1(-0.475,0) 2(0.475,0)
C0603
  rect 0.94x0.914 smd: 1(-0.775,0) 2(0.775,0)
C0805
  rect 1.15x1.45 smd: 1(-0.9,0) 2(0.9,0)
C1206
  rect 1.2x1.6 smd: 1(-1.35,0) 2(1.35,0)
CAPC3225X270N
  rect 1.397x2.692 smd: 1(-1.3,0) 2(1.3,0)
CC1210
  rect 1.397x2.794 smd: 1(-1.55,0) 2(1.55,0)
CON_40P_22_50X7_90_17_10MM
  rect 2.45x3.2 smd: (-12.325,0) (12.325,0)
  rect 0.3x1.9 smd: 1(-4.75,4.675) 2(-4.25,4.675) 3(-3.75,4.675) 4(-3.25,4.675) 5(-2.75,4.675) 6(-2.25,4.675) 7(-1.75,4.675) 8(-1.25,4.675) 9(-0.75,4.675) 10(-0.25,4.675) 11(0.25,4.675) 12(0.75,4.675) 13(1.25,4.675) 14(1.75,4.675) 15(2.25,4.675) 16(2.75,4.675) 17(3.25,4.675) 18(3.75,4.675) 19(4.25,4.675) 20(4.75,4.675) 21(-4.75,-4.675) 22(-4.25,-4.675) 23(-3.75,-4.675) 24(-3.25,-4.675) 25(-2.75,-4.675) 26(-2.25,-4.675) 27(-1.75,-4.675) 28(-1.25,-4.675) 29(-0.75,-4.675) 30(-0.25,-4.675) 31(0.25,-4.675) 32(0.75,-4.675) 33(1.25,-4.675) 34(1.75,-4.675) 35(2.25,-4.675) 36(2.75,-4.675) 37(3.25,-4.675) 38(3.75,-4.675) 39(4.25,-4.675) 40(4.75,-4.675)
  round 1.6 hole 1.2: PC1(-7.265,-4.675) PC2(7.265,-4.675) PC3(-7.265,4.675) PC4(7.265,4.675)
DFN_8P_2X2_80
  rect 0.45x0.25 smd: 1(-0.925,0.75) 2(-0.925,0.25) 3(-0.925,-0.25) 4(-0.925,-0.75) 5(0.925,-0.75) 6(0.925,-0.25) 7(0.925,0.25) 8(0.925,0.75)
  rect 0.9x1.7 smd: 9(0,0)
EMIFIL_NFM18PC225B1A3B
  rect 0.6x0.6 smd: 1(-0.8,0) 3(0.8,0)
  rect 0.4x1.2 smd: 2(0,0)
FB0402
  rect 0.533x0.533 smd: 1(-0.475,0) 2(0.475,0)
FB0603
  rect 0.94x0.914 smd: 1(-0.775,0) 2(0.775,0)
FIL_CER0574A
  rect 2.03x2.03 smd: 1(0.005,-0.19) 2(19.495,-0.19) 3(47.315,-0.19)
FIL_SAFFB942MAN0F0A
  rect 0.25x0.25 smd: 1(-0.425,0)
  rect 0.2x0.325 smd: 2(0,-0.288) 5(0,0.288)
  rect 0.25x0.325 smd: 3(0.425,-0.288) 4(0.425,0.288)
FLT_FAR-F6KA-1G5754-L4AJ
  rect 0.305x0.381 smd: 1(-0.5,0) 2(0,-0.288) 3(0.5,-0.288) 4(0.5,0.288) 5(0,0.288)
INDM6965X300N
  rect 1.83x3.43 smd: 1(-2.769,0) 2(2.769,0)
L0402
  rect 0.533x0.533 smd: 1(-0.475,0) 2(0.475,0)
L0603
  rect 0.94x0.914 smd: 1(-0.775,0) 2(0.775,0)
L0805
  rect 1.118x1.499 smd: 1(-0.85,0) 2(0.85,0)
LED_LTST-C190
  rect 0.787x0.787 smd: A(-0.75,0) K(0.75,0)
MTG370X800
  round 8 hole 3.7: 1(0,0)
P1161C
  rect 1.3x0.9 smd: 1(2.05,-1.4) 2(2.05,0) 3(2.05,1.4) 4(-2.05,1.4) 5(-2.05,0) 6(-2.05,-1.4)
QFN20P0X200X200-17N
  rect 0.67x0.5 smd: 1(-2.315,1.2) 2(-2.315,0.4) 3(-2.315,-0.4) 4(-2.315,-1.2) 9(2.315,-1.2) 10(2.315,-0.4) 11(2.315,0.4) 12(2.315,1.2)
  rect 0.5x0.67 smd: 5(-1.2,-2.315) 6(-0.4,-2.315) 7(0.4,-2.315) 8(1.2,-2.315) 13(1.2,2.315) 14(0.4,2.315) 15(-0.4,2.315) 16(-1.2,2.315)
  rect 2.875x2.875 smd: 17(0,0)
QFN50P300X400X80-20N
  rect 0.25x0.7 smd: 1(1.25,1.4) 2(0.75,1.4) 3(0.25,1.4) 4(-0.25,1.4) 6(-1.25,1.4) 11(-1.25,-1.4) 13(-0.25,-1.4) 14(0.25,-1.4) 15(0.75,-1.4) 16(1.25,-1.4)
  rect 0.7x0.25 smd: 7(-1.9,0.75) 8(-1.9,0.25) 9(-1.9,-0.25) 10(-1.9,-0.75) 17(1.9,-0.75) 18(1.9,-0.25) 19(1.9,0.25) 20(1.9,0.75)
  rect 0.4x0.22 smd: 21(-1.075,0)
  rect 0.36x0.22 smd: 22(-0.305,0)
QFN50P400X400X85-21N_A
  rect 0.8x0.25 smd: 1(-1.85,1) 2(-1.85,0.5) 3(-1.85,0) 4(-1.85,-0.5) 5(-1.85,-1) 11(1.85,-1) 12(1.85,-0.5) 13(1.85,0) 14(1.85,0.5) 15(1.85,1)
  rect 0.25x0.8 smd: 6(-1,-1.85) 7(-0.5,-1.85) 8(0,-1.85) 9(0.5,-1.85) 10(1,-1.85) 16(1,1.85) 17(0.5,1.85) 18(0,1.85) 19(-0.5,1.85) 20(-1,1.85)
  rect 2.15x2.15 smd: 21(0,0)
QFN65P500X500X100-21N_A
  custom 1.016x0.356 smd: 1(-2.408,1.3) 2(-2.408,0.65) 3(-2.408,0) 4(-2.408,-0.65) 5(-2.408,-1.3) 11(2.408,-1.3) 12(2.408,-0.65) 13(2.408,0) 14(2.408,0.65) 15(2.408,1.3)
  custom 0.356x1.016 smd: 6(-1.3,-2.408) 7(-0.65,-2.408) 8(0,-2.408) 9(0.65,-2.408) 10(1.3,-2.408) 16(1.3,2.408) 17(0.65,2.408) 18(0,2.408) 19(-0.65,2.408) 20(-1.3,2.408)
  rect 3.15x3.15 smd: 21(0,0)
R0402
  rect 0.533x0.533 smd: 1(-0.475,0) 2(0.475,0)
R0805
  rect 1.295x1.499 smd: 1(-1,0) 2(1,0)
R1210
  rect 1.397x2.794 smd: 1(-1.55,0) 2(1.55,0)
RC0805
  rect 1.295x1.499 smd: 1(-1,0) 2(1,0)
SM_3_TRANS_SOT23_120X55_50H
  rect 0.635x1.016 smd: 1(-0.94,-1.143) 2(0.94,-1.143) 3(0,1.143)
SMA_1P5_18X18_3N
  rect 7.501x2.25 smd: 1(-1.618,0) 2(-1.618,3.75) 3(-1.618,-3.75)
SMA_MM8430-2610
  rect 1x1 smd: 1(-1.55,0) 2(-1,-1.5) 3(1,-1.5) 4(1.55,0) 5(1,1.5) 6(-1,1.5)
SMDJ36CA
  rect 2.4x3.3 smd: 1(-3.3,0) 2(3.3,0)
SOD523F_2P_1_30X0_90_0_70MM
  rect 0.813x0.508 smd: A(1,0) K(-1,0)
SOP_10P_3_10X3_10_1_10MM
  rect 1.45x0.3 smd: 1(-2.2,1) 2(-2.2,0.5) 3(-2.2,0) 4(-2.2,-0.5) 5(-2.2,-1) 6(2.2,-1) 7(2.2,-0.5) 8(2.2,0) 9(2.2,0.5) 10(2.2,1)
SOT23
  rect 0.991x1.397 smd: 1(-0.953,-1.105) 2(0.953,-1.105) 3(0,1.105)
SOT23_0P95_2P90X1P75_5N
  rect 0.754x0.854 smd: 1(-0.95,-1.2) 2(0,-1.2) 3(0.95,-1.2) 4(0.95,1.2) 5(-0.95,1.2)
SOT23_3P_3_10X1_50_1_20MM
  rect 1x1.4 smd: B(-0.95,-1.1) C(0,1.1) E(0.95,-1.1)
SOT89H63
  rect 0.813x1.473 smd: 1(-1.5,0) 3(1.5,0)
  custom 2x5.4 smd: 2(0,0)
SOT95P280X140-6N
  rect 0.55x0.8 smd: 1(-0.95,-1.2) 2(0,-1.2) 3(0.95,-1.2) 4(0.95,1.2) 5(0,1.2) 6(-0.95,1.2)
SOTFL150P409X160-3N
  rect 0.71x1.5 smd: 1(-1.5,-1.92) 3(1.5,-1.92)
  custom 1.91x5.339 smd: 2(0,0)
TP_40C
  round 1.016 smd: 1(0,0)
unnamed
  round 1 smd: 1(0,0)
VQFN_0P5_3P1X3P1_17N
  rect 0.6x0.24 smd: 1(-1.4,0.75) 2(-1.4,0.25) 3(-1.4,-0.25) 4(-1.4,-0.75) 9(1.4,-0.75) 10(1.4,-0.25) 11(1.4,0.25) 12(1.4,0.75)
  rect 0.24x0.6 smd: 5(-0.75,-1.4) 6(-0.25,-1.4) 7(0.25,-1.4) 8(0.75,-1.4) 13(0.75,1.4) 14(0.25,1.4) 15(-0.25,1.4) 16(-0.75,1.4)
  rect 1.68x1.68 smd: 17(0,0)

## Nets
GND: C16.1 C67.2(GND) C1506.2 C1519.2 C2224.2 C2233.2 C2240.2 C2241.2 C2242.2 C2400.2 C2401.2 C2402.2 C2403.2 C2404.2 C2405.2 C2406.2 C2407.2 C2413.2 C2414.2 C2415.2 C2416.2 C2417.2 C2418.2 C2419.2 C2420.2 C2421.2 C2422.2 C2423.2 C2424.2 C2425.2 C2426.2 C2432.2 C2433.2 C2435.2 C2436.2 C2437.2 C2438.2 C2500.1 C2501.2 C2610.2 C2612.2 C2613.2 C2615.2 C3500.2 C3501.2 C3502.2 C3504.2 C3505.2 C3506.2 C3507.2 C3508.2 C3509.2 C3510.2 C3511.2 C3600.2 C3608.2 C3609.2 C3610.2 C4100.2 C4108.2 C4109.2 C4110.2 C4200.2 C4317.1 C4501.2 C4502.2 C4504.2 C4505.2 C4516.2 C4569.2 C4570.2 C4571.2 C4572.2 C4573.2 C4574.2 C4581.2 C4582.2 C4583.2 C4584.2 C4585.2 C4586.2 C4641.2 C4643.2 C4645.2 C4646.2 C4650.2 C4665.2 C4666.2 C4730.2 C4731.2 C4732.2 C4733.2 C4734.2 C4735.2 C4736.2 C4737.2 C4738.2(GND) C4740.2(GND) C4741.2(GND) C4742.2(GND) C4743.2 C4744.2 C4745.2 C4746.1 C4747.2(GND) C4748.2(GND) C4749.2 CON2.2 CON2.3 CON4.2 CON4.3 CON5.2 CON5.3 D10.2 D10116.K D10126.K D10128.K FL2503.2(GND_1) FL2503.3(GND_2) FL2503.5(GND_3) FL3310.2(GND_2) FL3310.3(GND_1) FL3310.5(GND_3) J20.10 J20.24 J20.28 J20.35 L2212.2 L2402.2 L2403.2 L2406.2 L2407.2 MH1.1 MH3.1 MH5.1 MH6.1 MH7.1 MH8.1 Q1.2(S) Q3.6(E1) Q4200.2(E) R82.2 R851.1 R852.1 R854.1 R855.1 R875.2 R876.2 R878.2 R879.2 R942.2 R2219.2 R2225.2 R2226.2 R2227.2 R2228.2 R2251.2 R3504.2 R3507.2 R3508.2 R3509.2 R3604.2 R3606.2 R4102.2 R5526.1 R10989.2 R10990.2 R10991.2 R10992.2 R10993.2 R11038.1 R11061.2 R11158.2 R11160.2 R11161.2 R11162.2 R11349.2 R11353.2 R11355.2 R11357.2 R11359.2 R11360.2 R11361.2 R11362.2 R11363.2 R11377.2 R11385.2 TP3042.1(TP) U5.3(GND) U1500.2(GND_1) U2203.2(GND) U2230.4(GND_1) U2230.10(GND_2) U2230.11(GND_3) U2230.12(GND_4) U2230.13(GND_5) U2230.18(GND_6) U2230.21(PAD) U2400.1(GND_1) U2400.3(GND_2) U2400.4(GND_3) U2400.7(GND_6) U2400.8(GND#8) U2400.10(GND#10) U2400.11(GND_8) U2400.13(GND_10) U2400.15(GND_11) U2400.17(EPAD) U2402.5(GND) U2403.5(GND) U2404.1(GND_1) U2404.3(GND_2) U2404.4(GND_3) U2404.7(GND_6) U2404.8(GND#8) U2404.10(GND#10) U2404.11(GND_8) U2404.13(GND_10) U2404.15(GND_11) U2404.17(EPAD) U2605.5(GND) U2606.2(GND) U2607.2(GND) U3500.6(GND1) U3500.7(GND2) U3500.10(GND3) U3500.11(GND4) U3500.18(GND5) U3600.8(GND_1) U3600.18(GND_2) U3600.21(THERMAL PAD) U4100.6(100MV) U4100.8(GND_1) U4100.10(800MV) U4100.11(1.6V) U4100.18(GND_2) U4100.21(THERMAL PAD) U7122.2(GND1) U7122.3(GND2) U7122.5(GND3) U7122.6(GND4) U7123.2(GND1) U7123.3(GND2) U7123.5(GND3) U7123.6(GND4) U7142.2(GND1) U7142.3(GND2) U7142.5(GND3) U7142.6(GND4) U7146.1(GND_1) U7146.3(GND_2) U7146.4(GND_3) U7146.6(GND_4) U7155.1(NC_1) U7155.4(NC_2) U7155.5(NC_3) U7155.6(NC_4) U7155.8(NC_5) U7155.9(EPAD) U7156.4(GND_1) U7156.10(GND_2) U7156.11(GND_3) U7156.12(GND_4) U7156.13(GND_5) U7156.18(GND_6) U7156.21(PAD) U7157.8(GND) U7157.17(PAD)
P12V: C3500.1 C3501.1 C3502.1 C3504.1 FB3409.2 FB3410.2 R3500.1 TP57.1(TP) U3500.4(VIN1) U3500.13(VIN2)
VCC_5P7V: C3505.1 C3506.1 C3507.1 C3508.1 C3509.1 C3512.2 FB6332.1 FB6333.1 L3500.2 R3503.2 R3506.2 TP58.1(TP)
VDD_3V3: C67.3(OUT) C4104.1 C4108.1 C4584.1 C4585.1 C4586.1 C4738.3(OUT) C4740.3(OUT) C4745.1 C4746.2 C4747.3(OUT) C4748.3(OUT) J20.21 J20.22 L30.1 Q2.E(EMITTER) R85.1 R3520.1 R3602.1 R4103.1 R11132.2 R11255.1 R11376.2 R11384.1(A[0]) TP86.1(TP) U4100.1(OUT_1) U4100.2(SNS) U4100.19(OUT_2) U4100.20(OUT_3) U7157.14(V+)
VIN_LDO_5P7V: C3600.1 C4100.1 C4572.1 C4573.1 C4574.1 C4581.1 C4582.1 C4583.1 FB6332.2 FB6333.2 R3600.1 R4100.1 TP85.1(TP) U3600.15(IN_1) U3600.16(IN_2) U3600.17(IN_3) U4100.15(IN_1) U4100.16(IN_2) U4100.17(IN_3)
3P3V_PGA: FB6322.1 R11130.1 R11132.1
ADC_3V3: C16.2 C4740.1(IN) R10.1 R60.2 R11382.1 R11383.1 U5.8(VDD)
GB_5V: C4741.1(IN) FB2202.2
LDO_5V_PG: R3602.2 R3603.1 U3600.4(PG)
LNA_PWR_5V: C4516.1 C4742.1(IN) FB2500.1 R1651.1
LT8640_INT_VCC: C3510.1 R3501.1 U3500.2(INTVCC)
PA1_5P0V: C2423.1 C2424.1 C2425.1 C2426.1 C2435.1 C2436.1 C2437.1 C2438.1 C4730.1 C4731.1 C4732.1 C4733.1 FB2401.2 U2404.5(VBIAS) U2404.12(VCC3) U2404.16(VCC1)
PA1_PWR_5V: FB2401.1 R11090.1 R11347.2
PA1_TX_EN: FB3413.1 R4203.2 R11090.2
PA2_5P0V: C2404.1 C2405.1 C2406.1 C2407.1 C2415.1 C2416.1 C2417.1 C2418.1 C4734.1 C4735.1 C4736.1 C4737.1 FB2400.2 U2400.5(VBIAS) U2400.12(VCC3) U2400.16(VCC1)
PA2_PWR_5V: FB2400.1 R11089.1 R11348.2
PA2_TX_EN: FB3412.1 R4202.2 R11089.2
PA_CON: C4686.1 R1183.2
PA_EN_CNTRL: D6.K J20.31 R10975.1 R11061.1
PA_LDO_EN: Q1.3(D) R3600.2 R3604.1 TP3039.1(TP) U3600.14(EN)
PD1_3V3: C2610.1 C4645.1 C4747.1(IN) R2613.1 U2606.5(VDD)
PD2_3V3: C2613.1 C4646.1 C4748.1(IN) R2615.1 U2607.5(VDD)
PG_LDO_3P3: J20.33 R4103.2 U4100.4(PG)
PG_LDO_5V: J20.34 R3603.2
PG_REG_5P7V: J20.32 R3505.2 R3520.2
PGA_PWR_DISABLE: J20.25 R10888.2
PWR_RF_5V: C3604.1 C3608.1 C4200.1 C4569.1 C4570.1 C4571.1 C4741.3(OUT) C4742.3(OUT) R3601.1 R4200.1 R10784.1(A[0]) R11347.1 R11348.1 TP74.1(TP) U3600.1(OUT_1) U3600.19(OUT_2) U3600.20(OUT_3)
RF_CON: C2230.1 C4465.1 L2212.1 R2224.1 R2226.1
RF_CON_C: C4682.1 R1181.1
RF_CPL_OUT: C4393.1 U2605.2(RFOUT)
RF_DET_F_OUT: C2615.1 R61.1 R2616.2 R11381.1
RF_DET_FWR_IN: R877.1 R878.1 U2605.4(FWR)
RF_DET_R_OUT: C2612.1 R63.1 R2614.2 R11380.1
RF_DET_REV_IN: R874.1 R875.1 U2605.3(REV)
RF_INTANT: C4478.1 C4625.2
RF_INTANT_C: C4478.2 CON5.1
RF_OUT: C4401.1 FL2703.2(ANT)
RF_PWR_DISABLE: Q1.1(G) R62.1 R11349.1
RF_RX_OUT: C4540.1 CON4.1
RF_THERMTRIP: J20.30 R11255.2 R11375.2
RX_ATTN_1DB: J20.4 R11362.1 R11370.2
RX_ATTN_2DB: J20.5 R11361.1 R11371.2
RX_ATTN_3V3: C67.1(IN) C4743.1 C4744.1 R11354.1 R11358.2 U7156.6(VDD_1) U7156.9(VDD_2)
RX_ATTN_4DB: J20.6 R11360.1 R11372.2
RX_ATTN_8DB: J20.8 R11359.1 R11373.2
RX_ATTN_ENB: J20.3 R11354.2 R11356.1 R11358.1 U7156.7(PUP1) U7156.8(PUP2)
RX_ATTN_IN: C4499.1 C4505.1 U7156.2(RFIN)
RX_ATTN_OUT: C4533.2 U7156.14(RFOUT)
RX_ATTN_P5DB: J20.7 R11363.1 R11369.2
RX_ATTN_P16DB: J20.9 R11352.1
RX_FILTER_IN: C4533.1 C4631.1
RX_FILTER_OUT: C4540.2 C4630.2
RX_LNA_IN: C4638.1 L3502.2
RX_LNA_OUT: C4499.2 L2500.2 R1650.2 U7155.7(RFOUT/VDD)
RX_NC: R11355.1 U7156.3(NC)
RX_RF_IN: C4530.2 FL2703.3(LOW)
RX_SAWIN: C4532.1 FL2503.1(IN)
RX_SAWOUT: C4531.2 FL2503.4(OUT)
TRXFE_IN_12V: C4749.1 D5.2(CATHODE) FB3409.1 FB3410.1 J20.1 J20.2 R513.1
TWI1_SCL: J20.40 R11374.2
TWI1_SDA: J20.39 R11256.2
TWI2_SCL: J20.38 R11379.2
TWI2_SDA: J20.37 R11378.2
TX_ATT_IN: C2215.1 U2230.2(RFIN)
TX_ATT_OUT: C4519.2 U2203.1(RFIN)
TX_ATTN_1DB: J20.12 R10990.1 R11365.2
TX_ATTN_2DB: J20.13 R10993.1 R11366.2
TX_ATTN_3V3: C2224.1 C4643.1 C4738.1(IN) R2220.2 R11097.1 U2230.6(VDD_1) U2230.9(VDD_2)
TX_ATTN_4DB: J20.14 R10992.1 R11367.2
TX_ATTN_8DB: J20.16 R10991.1 R11368.2
TX_ATTN_ENB: J20.11 R2220.1 R10994.1 R11097.2 U2230.7(PUP1) U2230.8(PUP2)
TX_ATTN_P5DB: J20.15 R10989.1 R11364.2
TX_ATTN_P16DB: J20.17 R11351.1
TX_NC: R2251.1 U2230.3(NC)
TX_PA_OUT: C4449.2 U2605.1(RFIN)
TX_PREAMP_OUT: C2237.1 C4520.2 C4666.1
TX_RF_IN: C4447.1 C4685.1 R2223.1 R2228.1
TX_RF_IN_18614129: C4425.1 CON2.1
TX_RF_IN_C: C4685.2 R1182.1
TX_RF_OUT: C4393.2 FL2703.1(HIGH)
UNNAMED_101_NPN_I2_B: Q40.1(B) Q40.3(C) R1750.2
UNNAMED_101_NPN_I2_E: Q40.2(E) R1751.2
UNNAMED_101_NPN_I19_B: Q41.1(B) Q41.3(C) R1752.2
UNNAMED_101_NPN_I19_E: Q41.2(E) R1753.2
N2442693: C2410.2 C2413.1 U2400.2(RFIN)
N2442695: C2410.1 L2400.2 L2402.1
N2442709: C4421.1 U2400.9(RFOUT)
N2442711: C2411.1 C2414.1 C4421.2
N2442719: C2411.2 L2403.1 U2403.2(0)
N2442731: C2400.1 C2401.1 C2402.1 C2403.1 FB3412.2 U2400.6(PAEN)
N2442759: C2432.1 C2439.2 U2404.2(RFIN)
N2442761: C2439.1 L2405.2 L2406.1
N2442775: C4422.1 U2404.9(RFOUT)
N2442777: C2433.1 C4422.2 C4470.1
N2442783: C4470.2 L2407.1 U2403.1(-90)
N2442795: C2419.1 C2420.1 C2421.1 C2422.1 FB3413.2 U2404.6(PAEN)
N2442823: R11158.1 R11159.1 U2402.3(0)
N2442825: R11161.1 R11163.1 U2402.4(-90)
N2442833: R850.1 R851.2 U2402.1(ISO)
N2442881: R853.1 R854.2 U2403.3(ISO)
N2442885: C4522.2 R11038.2 TP2403.1(TP)
N2442965: C4522.1 R853.2 R855.2
N2442977: C4414.1 C4488.1 U2403.4(RFOUT)
N2452276: C4523.2 U2606.1(RFIN)
N2452306: C4524.2 U2607.1(RFIN)
N2452334: R2616.1 U2607.4(OUT)
N2452522: R2614.1 U2606.4(OUT)
N3404619: C4519.1 C4665.1 U2230.14(RFOUT)
N3404767: R2219.1 R10994.2 U2230.5(LE)
N3406525: C2240.1 C2241.1 C2242.1 FB2202.1 L2214.1
N3406573: C4520.1 L2214.2 U2203.3(RFOUT)
N3408271: R11368.1 U2230.15(C8)
N3470389: R3500.2 R3504.1 TP3035.1(TP) U3500.14(EN/UV)
N3470417: C3511.1 U3500.16(TR/SS)
N3470429: R3508.1 U3500.15(RT)
N3470461: C3503.2 L3500.1 U3500.8(SW1) U3500.9(SW2) U3500.21(SW3) U3500.22(SW4)
N3470503: C3503.1 U3500.3(BST)
N3470519: R3503.1 U3500.1(BIAS)
N3470531: R3505.1 U3500.19(PG)
N3470539: C3512.1 R3506.1 R3509.1 U3500.20(FB)
N3470663: R3501.2 R3502.1 R3507.1
N3470683: R3502.2 U3500.17(SYNC)
N3490447: C2500.2 C2501.1 C4650.1 FB2500.2 L2500.1 R1650.1
N3490489: C4500.2 C4501.1 L3502.1
N17646328: R850.2 R852.2 R5526.2 TP2400.1(TP)
N17646554: C4413.1 C4447.2 U2402.2(RFIN)
N17673785: C4532.2 C4631.2
N17928744: R11366.1 U2230.17(C2)
N18469443: R942.1 R11351.2 U2230.1(C16)
N18558711: R11367.1 U2230.16(C4)
N18558734: R11365.1 U2230.19(C1)
N18558744: R11364.1 U2230.20(C1/2)
N18610572: C4425.2 U1500.1(RF-IN)
N18610577: C1506.1 C1519.1 C4641.1 FB6322.2 L1516.1
N18610670: C2215.2 L1516.2 U1500.3(RF-OUT/DC-IN)
N18611272: C4317.2 L30.2 Q3.4(E2)
N18611312: Q3.2(B1) R10888.1 R11385.1
N18611317: Q3.1(C1) R49.2
N18611323: Q3.5(B2) R49.1
N18611333: Q3.3(C2) R11130.2
N18873995: D5.1(ANODE) D10.1 TP3041.1(TP)
N18874039: D10126.A R513.2
N19046935: C4110.1 U4100.13(NR/SS)
N19046998: C4109.1 U4100.12(BIAS)
N19047009: C4104.2 U4100.3(FB)
N19047026: R4100.2 R4101.1 R4102.1 TP3037.1(TP)
N19047068: R4101.2 U4100.14(EN)
N19122168: L2400.1 R11159.2 R11160.1
N19122434: L2405.1 R11162.1 R11163.2
N19173620: C4488.2 C4686.2 U7146.5(IN)
N19173696: C4449.1 U7146.2(OUT)
N19196613: C4502.1 C4504.1 L3503.2 R1651.2 U7155.3(VBIAS)
N19196616: C4500.1 L3503.1 U7155.2(RFIN)
N19638038: C4523.1 R874.2 R876.1
N19640647: C4524.1 R877.2 R879.1
N19645111: C4531.1 C4630.1
N19646465: C4530.1 C4638.2
N19674332: C4413.2 R1182.2 U7122.4(OUT)
N19674512: C4414.2 R1183.1 U7123.4(OUT)
N20365150: C3604.2 R3601.2 R3606.1 U3600.3(FB)
N20365219: C3609.1 U3600.12(BIAS)
N20365249: C3610.1 U3600.13(NR/SS)
N20449161: C4682.2 FL3310.4(OUT) R2224.2 R2225.1
N20449168: C4465.2 R1181.2 U7142.4(OUT)
N20449298: C2237.2 FL3310.1(IN)
N20449320: C2230.2 C2233.1 R2223.2 R2227.1
N20456126: R11369.1 U7156.20(C1/2)
N20456131: R11370.1 U7156.19(C1)
N20456136: R11371.1 U7156.17(C2)
N20456141: R11372.1 U7156.16(C4)
N20456197: R11373.1 U7156.15(C8)
N20456216: R11352.2 R11353.1 U7156.1(C16)
N20456296: R11356.2 R11357.1 U7156.5(LE)
N20458116: J20.26 R61.2
N20458145: J20.27 R62.2
N20458186: J20.29 R63.2
N20460527: C4401.2 C4625.1
N20469905: Q4200.3(C) R4200.2 R4202.1 R4203.1
N20469972: Q4200.1(B) R10975.2
N20476140: R2613.2 U2606.3(SHDN)
N20476316: R2615.2 U2607.3(SHDN)
N20480124: C4671.1 R1750.1 U7157.6(D1+)
N20480154: C4672.1 R1752.1 U7157.5(D2+)
N20480158: R11375.1 U7157.10(NTHERM)
N20480184: C4671.2 C4672.2 R1751.1 R1753.1 U7157.3(D4+) U7157.4(D3+) U7157.7(D-)
N20480233: R11256.1 U7157.12(SDA)
N20480260: R11374.1 U7157.13(SCL)
N20480623: R11376.1 U7157.9(ADD)
N20482043: R60.1 R11377.1 U5.1(ADDR)
N20482107: R10.2 U5.2(ALERT/RDY)
N20482447: R11378.1 U5.9(SDA)
N20482450: R11379.1 U5.10(SCL)
N20482724: R11380.2 U5.4(AIN0)
N20482753: R11381.2 U5.5(AIN1)
N20482870: R11382.2 U5.6(AIN2)
N20482875: R11383.2 U5.7(AIN3)
N20483231: D10116.A R10784.2(B[0])
N20489678: Q2.B(BASE) R83.2
N20489681: D6.A R83.1 R85.2
N20489725: D10127.A Q2.C(COLLECTOR)
N20501837: D10127.K R82.1
N20501901: D10128.A R11384.2(B[0])

Pads without a net: J20 18 19 20 23 36 PC1 PC2 PC3 PC4; NOREF 1; NOREF#2 1; NOREF#3 1; NOREF#4 1; NOREF#5 1; NOREF#6 1; NOREF#7 1; NOREF#8 1; U2400 14; U2404 14; U3600 2 5 6 7 9 10 11; U4100 5 7 9; U7122 1; U7123 1; U7142 1; U7157 1 2 11 15 16

## Via types
v1: diameter 0.559, hole 0.254, TOP to BOTTOM, 852 vias
v2: diameter 0.508, hole 0.254, TOP to BOTTOM, 394 vias
v3: diameter 0.6, hole 0.254, TOP to BOTTOM, 414 vias

## Routing (per net, layer and track width the routed paths; a pad name or vN(x,y) marks a point on that pad's centre or on a via; arc(x,y) is an arc through that point)
GND: length 170.3
  TOP w0.203: FL3310.3 13.82,99.91 13.61,99.69 ; FL3310.5 15.9,100.34 16.02,100.46 ; v2(13.43,100.3) 13.95,100.3 13.98,100.34 FL3310.2
  TOP w0.254: 11.17,117.73 12,117.73 12.28,118.01 U2230.10 ; U2230.12 13.63,117.38 v2(13.31,117.07) ; 12.13,117.12 12.42,117.12 13.13,117.83 U2230.11 ; v1(13.36,120.71) 13.63,120.98 U2230.4 ; C2241.2 v1(10.11,109.22) ; v1(11.29,124.08) 11.3,124.08 R2219.2 ; C2242.2 v1(11.38,109.22) ; v1(14.89,120.71) 14.89,120.15 15.09,119.95 U2230.18 ; v1(8.5,109.22) 8.66,109.06 C2240.2 ; v1(13.36,119.19) 13.92,119.19 14.13,118.99 U2230.13
  TOP w0.305: C1519.2 v1(11.68,127.08) ; v1(10.18,127.15) 10.43,126.9 C1506.2 ; C4641.2 9.29,127.35 v1(9.29,127.36) ; U5.3 v1(39.49,44.96)
  TOP w0.381: 11.13,29.76 v1(11.13,29.54) 11.13,29.23 ; C2612.2 v1(10.44,47.31) ; R876.2 v1(5.86,36.07) ; v1(18.52,61.39) 18.92,61.79 U2404.15 ; U7146.3 v1(24.54,35.47) ; L2402.2 34.38,73.33 v1(34.41,73.36) ; 27.93,46.38 v1(27.93,46.67) 27.93,46.95 ; U7142.2 v1(8.81,93.16) ; 27.58,49.72 27.58,49.72 L2403.2 ; U4100.8 v1(19.6,104.09) ; TP3042.1 v1(42.59,133.65) ; v1(38.84,60.25) 39.95,60.25 U2400.13 ; U4100.18 v1(24.36,104.09) ; C2615.2 v1(15.63,47.31) ; R851.1 v1(24.24,81.21) ; L2407.2 v1(22.76,49.72) ; R875.2 v1(5.86,32.64) ; U7122.3 v1(34.42,87.16) ; v1(27.91,81.85) 27.91,82.11 ; v1(27.91,81.85) v1(26.89,81.85) 26.22,81.85 v1(26.15,81.92) ; v1(27.91,81.85) 27.91,81.57 ; U1500.2 v1(15.53,129.26) ; D10128.K v1(59.5,128.91) ; R11161.2 v1(23.86,79.01) ; R2228.2 v1(28.41,86.8) ; v1(4.31,120.7) C4738.2 v1(4.31,123.19) ; v1(14.85,46.74) C4748.2 v1(12.44,46.74) ; v1(17.36,123.44) 17.36,123.44 R10990.2 ; R878.2 v1(16.41,32.64) ; v1(7.99,46.1) C4747.2 v1(5.45,46.1) ; v1(15.99,38.79) 15.63,39.15 U2607.2 ; v1(40.38,39.88) C4740.2 v1(40.38,42.42) ; C2613.2 v1(10.89,41.4) ; v1(8.94,41.28) 8.54,40.88 U2606.2 ; R11162.2 23.7,75.58 v1(23.69,75.59) ; U7123.5 v1(21.05,45.21) ; R11158.2 v1(31.95,79.01) ; C2233.2 v1(21.42,90.58) ; U7122.2 37.57,85.96 v1(37.58,85.98) ; U4100.11 v1(20.74,101.68) ; C4666.2 v1(12.86,103.92) ; v1(8.86,117.93) 8.89,117.97 C2224.2 ; R2227.2 v1(22.7,90.58) ; U7146.6 20.77,40.94 v1(20.77,40.94) ; U7146.1 v1(21.74,35.53) ; U4100.6 v1(20.68,106.42) ; R11160.2 v1(31.95,75.68) ; R2225.2 v1(16.69,98.28) ; C16.1 45.25,44.66 v1(45.25,43.94) ; U4100.10 v1(19.63,102.79) ; v1(37.69,62.44) v1(37.69,61.39) 37.61,61.39 ; R2226.2 v1(16.69,94.68) ; v1(24.53,42.04) 24.54,42.03 U7146.4 ; C4665.2 16.23,116.54 ; v1(17.36,120.27) 17.36,120.5 17.77,120.9 R10993.2 ; U7123.3 v1(18.05,45.21) ; D10126.K v1(59.5,131.9) ; U2404.13 18.57,60.19 v1(18.52,60.25) ; U2400.15 39.97,61.83 39.28,61.83 v1(38.84,61.39) ; C4317.1 v1(10.97,132.62) ; Q3.6 v1(7.56,131.63) ; U7142.5 v1(10.81,98.55) ; C4646.2 v1(10.89,40.13) ; R942.2 v1(19.01,126.97) ; U7123.2 v1(18.05,49.55) ; U7142.6 v1(8.81,98.55) ; L2212.2 v1(13.14,93.46) ; U7122.6 37.6,82.96 v1(37.61,82.96) ; R5526.1 v1(18.69,78.69) ; R879.2 v1(12.95,36.07) ; U7123.6 v1(21.05,49.58) ; v1(36.85,87.25) C4741.2 v1(36.85,89.76) ; D10116.K v1(59.5,126.21) ; R852.1 v1(21.05,81.21) ; U7142.3 v1(10.81,93.16) ; C4643.2 v1(9.65,122.17) ; U7122.5 v1(34.42,81.77)
  TOP w0.394: 35.04,47.25 R11377.2 v1(34.19,47.25) ; C4581.2 25.31,99.04 v1(25.31,99.03) ; v1(41.44,33.2) 41.42,33.22 C4742.2 41.42,35.43 v1(41.44,35.46) ; R10992.2 v1(17.26,118.36) ; R855.1 28.7,39.99 v1(28.46,39.76) ; R854.1 v1(28.44,43.87)
  TOP w0.508: U2400.3 U2400.4 ; U2400.1 39.69,63.7 ; 17.77,58.34 U2404.11 U2404.10 16.97,58.19 v3(17.61,57.55) ; U2404.3 U2404.4 ; U2400.10 U2400.11 ; U2404.1 19.45,63.7
  BOTTOM w0.254: U7157.8 41.91,76.52 v1(42.05,76.66) ; C4572.2 36.9,106.9 36.74,107.06 v1(36.74,107.07) ; J20.35 v1(34.07,152.87) ; v2(48.38,131.32) 48.44,131.26 FL2503.3 ; v1(28.95,152.65) 28.57,152.27 J20.24 ; FL2503.5 50.56,130.76 ; v1(50.44,38.61) 50.43,38.61 U7155.1 ; U7156.18 49.79,114.62 49.58,114.41 v1(49.58,113.86) ; v1(48.06,115.38) 48.57,115.38 48.82,115.63 U7156.13 ; U7156.10 v1(46.97,116.37) ; v1(31.09,149.35) 30.57,149.87 J20.28 ; v1(50.56,40.46) 50.41,40.46 50.41,40.46 U7155.8 ; v1(48.06,113.86) 48.32,113.59 U7156.4 ; U7155.5 v1(47.59,40.46) ; FL2503.2 48.38,130.76 ; U3500.7 29.61,121.67 v1(29.61,122.5) 29.4,122.3 U3500.6 ; U3500.10 29.59,119.26 ; R3509.2 v1(21.58,121.88) ; U7155.4 v1(47.77,38.61) ; v1(48.02,41.38) 48.23,41.38 48.84,40.76 U7155.6
  BOTTOM w0.305: v1(32.48,102.39) 32.48,102.39 U3600.8 ; v1(32.27,139.37) 32.27,139.85 31.57,140.56 J20.10 ; Q1.2 v1(32.53,113.64)
  BOTTOM w0.381: v1(60.7,92.84) 60.44,93.09 R11061.2 ; C4505.2 47.54,46.69 ; R3604.2 38.83,109.11 v1(38.85,109.09) ; U3600.18 v1(37.23,102.39) ; C3610.2 v1(34.67,109.4) ; R11349.2 31.44,107.14 31.28,106.98 v1(31.28,106.5) ; C3609.2 v1(33.01,109.4) ; v1(20.82,117.73) 20.9,117.81 R3507.2 ; R3508.2 v1(22.44,115.17) ; C3510.2 v1(24.25,127.4) ; v1(41.22,111.05) C67.2 v1(41.22,113.59) ; R82.2 v1(55.43,107.96) ; R3504.2 v1(23.56,117.63)
  BOTTOM w0.394: C4501.2 v1(47.6,33.36) ; v1(44.47,111.2) 44.47,111.21 C4743.2 ; v1(53.46,112.24) 53.15,111.93 R11353.2 ; R11361.2 v1(56.56,116.08) ; R11359.2 v1(56.56,118.62) ; C4744.2 43.41,116.98 v1(43.4,116.99) ; R11363.2 v1(56.56,113.54) ; C4745.2 v1(43.19,80.99) ; R11355.2 v1(46.98,108.46) ; R11360.2 v1(56.56,117.35) ; R11357.2 v1(44.44,108.46) ; Q4200.2 v1(61.38,88.88) ; R11362.2 v1(56.56,114.81)
  vias: v1(1.65,157.19) v1(1.65,154.65) v1(1.65,152.1) v1(1.65,149.56) v1(1.65,147.02) v1(1.65,144.48) v1(1.65,141.93) v1(1.65,139.39) v1(1.65,136.85) v1(1.65,134.31) v1(1.65,131.76) v1(1.65,129.22) v1(1.64,128.44) v1(1.65,126.67) v1(1.65,124.13) v1(1.65,119.05) v1(1.65,116.51) v1(1.65,113.97) v1(1.65,111.42) v1(1.65,108.88) v1(1.65,106.34) v1(1.65,103.79) v1(1.65,101.25) v1(1.65,98.71) v1(1.65,96.17) v1(1.65,93.62) v1(1.65,91.08) v1(1.65,88.54) v1(1.65,86) v1(1.65,83.45) v1(1.65,80.91) v1(1.65,78.37) v1(1.65,75.83) v1(1.65,73.28) v1(1.65,70.74) v1(1.65,42.19) v1(1.65,39.47) v1(1.65,36.76) v1(1.65,34.04) v1(1.65,31.32) v1(1.65,28.61) v1(1.65,25.89) v1(1.65,23.17) v1(1.65,20.46) v1(1.65,17.74) v1(1.65,15.03) v1(1.65,12.31) v1(1.65,9.59) v1(1.65,6.88) v1(2.35,4.26) v1(2.61,67.38) v1(2.61,45.55) v1(2.68,20.05) v1(2.68,17.51) v1(2.68,14.97) v1(2.68,12.43) v1(3.57,42.82) v1(3.57,41.43) v1(4.19,157.19) v1(5.2,65.04) v1(5.2,47.89) v1(6.49,17.51) v1(6.49,14.97) v1(6.49,12.43) v1(6.73,157.19) v1(7.4,49.38) v1(9.1,51.41) v1(9.1,29.54) v1(9.27,157.19) v1(10.12,30.81) v1(10.12,29.54) v1(10.15,28.25) v1(10.3,17.51) v1(10.3,14.97) v1(10.3,12.43) v1(11.13,30.81) v1(11.13,28.27) v1(11.81,167.35) v1(11.81,164.81) v1(11.81,162.27) v1(11.81,159.73) v1(11.81,157.19) v1(12.13,30.76) v1(12.15,29.54) v1(12.13,28.28) v1(12.69,74.67) v1(13.17,29.54) v1(14.13,119.95) v1(14.11,17.51) v1(14.11,14.97) v1(14.11,12.43) v1(14.34,110.92) v1(14.42,75.11) v1(14.57,129.24) v1(14.6,1.65) v1(14.89,119.19) v1(15.36,110.92) v1(15.88,123.09) v1(16.15,101.48) v1(16.25,99.85) v1(16.17,96.79) v1(16.25,75.11) v1(16.23,62.53) v1(16.23,61.39) v1(16.23,60.25) v1(16.37,111.61) v1(16.37,110.29) v1(16.55,129.95) v1(16.55,128.63) v1(16.48,70.56) v1(16.63,72.03) v1(17.18,1.65) v1(17.39,111.61) v1(17.39,110.29) v1(17.38,62.46) v1(17.37,61.39) v1(17.37,60.25) v1(17.52,108.27) v1(17.56,129.95) v1(17.56,128.63) v1(17.75,73.05) v1(17.77,75.11) v1(17.92,17.51) v1(17.92,14.97) v1(17.92,12.43) v1(18.23,43.89) v1(18.41,111.61) v1(18.41,110.29) v1(18.41,108.61) v1(18.52,62.53) v1(18.58,129.95) v1(18.58,128.63) v1(19.07,42.82) v1(19.42,108.61) v1(19.45,73.08) v1(19.76,1.65) v1(19.93,75.11) v1(20.26,41.99) v1(21.1,73.2) v1(21.35,75.11) v1(21.42,115.17) v1(21.73,17.51) v1(21.73,14.97) v1(21.73,12.43) v1(21.82,105.36) v1(21.82,104.09) v1(21.82,102.82) v1(22.33,1.65) v1(22.6,75.11) v1(23.09,105.36) v1(23.09,104.09) v1(23.09,102.82) v1(23.38,73.18) v1(24.29,79.93) v1(24.33,78.32) v1(24.33,76.79) v1(24.35,73.4) v1(24.36,105.36) v1(24.36,102.82) v1(24.63,140.21) v1(24.63,110.9) v1(24.58,109.96) v1(24.88,154.69) v1(24.91,96.67) v1(25.02,167.35) v1(25.02,164.81) v1(25.02,162.27) v1(25.02,159.73) v1(25.54,17.51) v1(25.54,14.97) v1(25.54,12.43) v1(25.77,154.69) v1(25.9,140.21) v1(25.9,139.06) v1(25.9,46.67) v1(26.24,70.89) v1(26.66,154.69) v1(26.81,121.34) v1(26.86,126.14) v1(26.86,125.09) v1(26.89,83.12) v1(26.91,80.57) v1(26.91,78.28) v1(26.91,76.76) v1(26.92,73.4) v1(26.9,72.03) v1(26.95,47.92) v1(26.92,46.67) v1(26.93,45.44) v1(27.01,75.21) v1(27.91,83.12) v1(27.91,80.58) v1(27.93,73.03) v1(27.93,47.94) v1(27.93,45.4) v1(28.52,129.54) v1(28.85,75.21) v1(28.89,83.1) v1(28.92,81.85) v1(28.9,80.59) v1(28.89,78.28) v1(28.89,76.76) v1(28.87,73.4) v1(28.93,47.94) v1(28.95,46.67) v1(28.9,45.41) v1(29.07,116.84) v1(29.07,115.82) v1(29.1,103.33) v1(29.07,102.03) v1(29.84,129.54) v1(29.76,106.5) v1(29.76,105.23) v1(29.96,46.67) v1(30.14,101.27) v1(30.19,81.85) v1(30.6,116.84) v1(30.6,115.82) v1(31.28,105.23) v1(31.48,78.28) v1(31.48,76.76) v1(31.54,73.4) v1(31.59,129.59) v1(31.97,43.38) v1(32.3,138.48) v1(33.24,129.59) v1(33.16,20.05) v1(33.16,17.51) v1(33.16,14.97) v1(33.16,12.43) v1(33.29,139.37) v1(33.32,138.48) v1(33.39,74.98) v1(33.7,78.03) v1(33.68,1.65) v1(34.31,139.37) v1(34.33,138.48) v1(34.69,103.66) v1(34.69,102.39) v1(34.69,101.12) v1(34.99,130) v1(35.22,78.03) v1(35.2,74.93) v1(35.21,1.65) v1(35.7,73.41) v1(35.79,157.19) v1(35.96,103.66) v1(35.96,102.39) v1(35.96,101.12) v1(36.55,62.53) v1(36.55,61.39) v1(36.58,60.36) v1(36.72,130) v1(36.97,20.05) v1(36.97,17.51) v1(36.97,14.97) v1(36.97,12.43) v1(37.23,103.66) v1(37.23,101.12) v1(37.41,73.23) v1(37.69,60.25) v1(37.79,1.65) v1(38.4,129.95) v1(38.48,167.35) v1(38.48,164.81) v1(38.48,162.27) v1(38.48,159.73) v1(38.48,157.19) v1(38.62,72.62) v1(38.84,62.53) v1(39.31,71.6) v1(39.92,129.87) v1(40.37,1.65) v1(40.78,20.05) v1(40.78,17.51) v1(40.78,14.97) v1(40.78,12.43) v1(41.01,129.95) v1(42.05,77.8) v1(42.1,96.88) v1(42.1,95.43) v1(42.21,104.17) v1(42.21,102.39) v1(42.21,100.61) v1(42.61,129.95) v1(42.66,77.22) v1(42.92,96.01) v1(42.94,1.65) v1(42.97,32.26) v1(43.07,37.01) v1(43.25,77.8) v1(43.25,76.66) v1(43.65,105.92) v1(43.7,104.19) v1(43.7,102.41) v1(43.7,100.63) v1(43.73,96.82) v1(43.73,95.4) v1(43.76,32.23) v1(43.91,36.98) v1(44.59,20.05) v1(44.59,17.51) v1(44.59,14.97) v1(44.59,12.43) v1(45.52,1.65) v1(46.69,33.97) v1(46.67,33.13) v1(48.1,1.65) v1(48.4,17.51) v1(48.4,14.97) v1(48.4,12.43) v1(48.5,39.54) v1(48.82,114.62) v1(49.58,115.38) v1(49.67,39.54) v1(50.67,1.65) v1(51.69,167.35) v1(51.69,164.81) v1(51.69,162.27) v1(51.69,159.73) v1(51.69,157.19) v1(52.21,17.51) v1(52.21,14.97) v1(52.21,12.43) v1(52.95,56.47) v1(53.32,59.09) v1(53.32,53.84) v1(53.31,40.01) v1(53.33,39.09) v1(54.39,61.52) v1(54.4,51.41) v1(54.75,39.01) v1(55.08,157.19) v1(56.02,17.51) v1(56.02,14.97) v1(56.02,12.43) v1(56.1,63.55) v1(56.1,49.38) v1(56.35,39.09) v1(58.3,65.04) v1(58.3,47.89) v1(58.46,157.19) v1(59.83,17.51) v1(59.83,14.97) v1(59.83,12.43) v1(60.3,2.44) v1(60.89,67.38) v1(60.89,45.55) v1(61.85,157.19) v1(61.85,154.65) v1(61.85,152.1) v1(61.85,149.56) v1(61.85,147.02) v1(61.85,144.48) v1(61.85,141.93) v1(61.85,139.39) v1(61.85,136.85) v1(61.85,134.31) v1(61.85,131.76) v1(61.85,129.22) v1(61.85,126.68) v1(61.85,124.14) v1(61.85,121.59) v1(61.85,119.05) v1(61.85,116.51) v1(61.85,113.97) v1(61.85,111.42) v1(61.85,108.88) v1(61.85,106.34) v1(61.85,103.79) v1(61.85,101.25) v1(61.85,98.71) v1(61.85,96.17) v1(61.85,86) v1(61.85,83.45) v1(61.85,80.91) v1(61.85,78.37) v1(61.85,75.83) v1(61.85,73.28) v1(61.85,70.74) v1(61.85,42.19) v1(61.85,39.62) v1(61.85,37.05) v1(61.85,34.48) v1(61.85,31.91) v1(61.85,29.35) v1(61.85,26.78) v1(61.85,24.21) v1(61.85,19.07) v1(61.85,16.5) v1(61.85,13.93) v1(61.85,8.8) v1(61.85,6.23) v2(6.34,37.47) v2(6.34,34.89) v2(6.34,33.94) v2(6.34,31.25) v2(6.26,23.39) v2(6.26,21.87) v2(6.26,20.35) v2(7.03,19.13) v2(7.61,28.96) v2(7.61,27.44) v2(7.61,25.92) v2(7.59,24.23) v2(8.55,19.13) v2(8.84,37.47) v2(8.84,34.89) v2(8.84,33.94) v2(8.84,31.92) v2(10.11,27.31) v2(10.11,25.92) v2(10.13,24.26) v2(10.07,19.13) v2(11.42,23.39) v2(11.42,21.87) v2(11.42,20.35) v2(12.92,112.5) v2(12.92,109.48) v2(13.07,130.89) v2(13.1,127.72) v2(13.25,129.24) v2(13.29,144.77) v2(13.29,143.21) v2(13.29,141.65) v2(13.29,140.09) v2(13.29,138.52) v2(13.31,115.54) v2(13.31,114.02) v2(13.31,110.97) v2(13.31,104.88) v2(13.31,101.83) v2(13.38,137.57) v2(13.38,135.87) v2(13.38,134.17) v2(13.38,132.47) v2(13.43,98.78) v2(13.43,38.42) v2(13.43,37.47) v2(13.43,34.89) v2(13.43,33.94) v2(13.43,31.92) v2(13.41,27.16) v2(13.68,151.43) v2(14.04,92.02) v2(14.79,153.09) v2(15.2,29.66) v2(15.2,27.16) v2(15.46,51.66) v2(15.71,91.04) v2(15.88,137.57) v2(15.88,135.87) v2(15.88,134.17) v2(15.88,132.47) v2(15.89,125.98) v2(15.88,107.92) v2(15.88,106.4) v2(15.88,104.88) v2(15.88,103.35) v2(15.93,37.47) v2(15.93,34.89) v2(15.93,33.94) v2(15.93,31.35) v2(15.98,154.64) v2(15.97,149.46) v2(15.97,147.9) v2(15.97,146.34) v2(15.97,144.77) v2(15.97,143.21) v2(15.97,141.65) v2(15.97,140.09) v2(15.97,138.52) v2(15.97,115.54) v2(15.97,114.02) v2(16.15,95.85) v2(16.25,109.22) v2(16.34,130.83) v2(16.35,127.78) v2(16.33,112.54) v2(16.39,93.86) v2(16.72,156.44) v2(16.69,151.2) v2(16.98,158.37) v2(16.99,29.66) v2(16.99,27.16) v2(17.1,50.92) v2(17.24,91.04) v2(17.56,93.69) v2(17.72,152.41) v2(18.55,153.76) v2(18.5,93.69) v2(18.5,91.04) v2(18.78,29.66) v2(18.78,27.16) v2(19.16,155.23) v2(19.19,50.92) v2(19.36,53.5) v2(19.53,156.78) v2(19.66,158.37) v2(20.09,93.69) v2(20.09,91.04) v2(20.58,29.66) v2(20.58,27.16) v2(21.3,53.5) v2(21.28,50.92) v2(21.68,93.69) v2(21.89,34.24) v2(21.89,32.6) v2(21.89,30.97) v2(22.48,27.67) v2(22.68,45.04) v2(23.04,7.57) v2(23.04,6.05) v2(23.04,4.52) v2(23.04,3) v2(23.27,93.69) v2(23.38,91.05) v2(23.88,29.06) v2(24.05,9.1) v2(24.21,50.81) v2(24.26,53.5) v2(24.41,47.8) v2(24.43,46.56) v2(24.38,45.01) v2(24.39,34.24) v2(24.39,32.6) v2(24.39,30.97) v2(24.86,93.69) v2(24.86,91.04) v2(25.58,9.1) v2(25.75,23.39) v2(25.75,21.87) v2(25.75,20.35) v2(26.13,52.72) v2(26.45,93.69) v2(26.45,91.04) v2(26.46,43.07) v2(26.83,24.7) v2(27.01,51) v2(26.97,44.32) v2(27.1,18.7) v2(27.1,17.12) v2(27.1,15.54) v2(27.1,10.62) v2(27.1,9.1) v2(28.03,93.69) v2(28.03,91.04) v2(28.35,24.7) v2(28.8,89.71) v2(28.8,88.18) v2(28.8,85.13) v2(28.95,50.72) v2(28.95,42.15) v2(28.95,41.2) v2(28.95,38.71) v2(28.95,37.76) v2(28.95,31.94) v2(29.6,18.6) v2(29.6,16.99) v2(29.6,15.37) v2(29.6,10.62) v2(29.6,9.1) v2(29.69,52.7) v2(29.84,93.11) v2(29.88,24.7) v2(30.91,23.39) v2(30.91,21.87) v2(30.91,20.35) v2(31.07,91.84) v2(31.13,9.1) v2(31.22,53.51) v2(31.46,50.72) v2(31.46,49.19) v2(31.46,47.8) v2(31.46,45.54) v2(31.46,42.15) v2(31.46,38.71) v2(31.46,37.76) v2(31.46,31.94) v2(31.49,90.2) v2(31.49,88.68) v2(31.49,87.16) v2(31.46,44.83) v2(31.46,41.39) v2(31.58,83.26) v2(31.59,81.83) v2(31.6,80.37) v2(31.97,36.15) v2(31.97,34.62) v2(31.97,33.1) v2(32.63,86.61) v2(32.65,9.1) v2(32.83,53.53) v2(33.67,7.57) v2(33.67,6.05) v2(33.67,4.52) v2(33.67,3) v2(33.94,51) v2(34.86,53.52) v2(35.72,51) v2(37.15,51.59) v2(37.77,52.75) v2(43.84,159.39) v2(44.18,157.72) v2(45.12,156.3) v2(46.31,154.75) v2(46.52,159.39) v2(47.11,158.24) v2(47.06,152.94) v2(47.32,151) v2(47.32,149.31) v2(47.32,147.63) v2(47.32,145.94) v2(47.32,144.25) v2(47.32,142.57) v2(47.32,140.88) v2(47.32,139.19) v2(47.32,137.51) v2(47.33,135.98) v2(47.43,134.46) v2(48.05,156.98) v2(47.98,129.89) v2(47.99,128.36) v2(47.99,126.84) v2(47.98,125.32) v2(47.98,123.81) v2(47.98,122.13) v2(47.98,120.45) v2(48.01,118.78) v2(48.04,44.22) v2(48.04,42.7) v2(48.04,35.69) v2(48.04,34.74) v2(48.05,32.15) v2(48.05,30.62) v2(48.07,110.72) v2(48.07,109.17) v2(48.07,107.63) v2(48.07,106.08) v2(48.07,104.53) v2(48.07,102.98) v2(48.07,101.44) v2(48.07,99.89) v2(48.07,98.34) v2(48.07,96.79) v2(48.07,95.25) v2(48.07,93.7) v2(48.07,92.15) v2(48.07,90.6) v2(48.07,89.06) v2(48.07,87.51) v2(48.07,85.96) v2(48.07,84.41) v2(48.07,82.87) v2(48.07,81.32) v2(48.07,79.77) v2(48.07,78.22) v2(48.07,76.68) v2(48.07,75.13) v2(48.07,73.58) v2(48.07,72.03) v2(48.07,70.49) v2(48.07,68.94) v2(48.07,67.39) v2(48.07,65.84) v2(48.07,64.3) v2(48.07,62.75) v2(48.07,61.2) v2(48.07,59.65) v2(48.07,58.11) v2(48.07,56.56) v2(48.07,55.01) v2(48.07,53.46) v2(48.07,51.92) v2(48.07,50.37) v2(48.07,48.82) v2(48.07,45.73) v2(48.31,132.96) v2(48.26,29.21) v2(48.89,155.62) v2(49.5,154.15) v2(49.79,28.14) v2(49.87,152.59) v2(49.9,136.01) v2(50,151) v2(50,144.25) v2(50,142.57) v2(50,140.88) v2(50,139.19) v2(50,137.51) v2(50.64,129.89) v2(50.57,128.38) v2(50.59,126.86) v2(50.63,125.33) v2(50.63,123.81) v2(50.58,122.18) v2(50.63,120.45) v2(50.6,118.81) v2(50.57,110.72) v2(50.57,109.18) v2(50.57,107.64) v2(50.57,106.1) v2(50.57,104.55) v2(50.57,103.01) v2(50.57,101.47) v2(50.57,99.92) v2(50.57,98.38) v2(50.57,96.84) v2(50.57,95.29) v2(50.57,93.75) v2(50.57,92.21) v2(50.57,90.67) v2(50.57,89.12) v2(50.57,87.58) v2(50.57,86.04) v2(50.57,78.32) v2(50.57,76.78) v2(50.57,75.24) v2(50.57,73.69) v2(50.57,72.15) v2(50.57,70.61) v2(50.57,69.06) v2(50.57,67.52) v2(50.57,65.98) v2(50.57,64.43) v2(50.57,62.89) v2(50.57,61.35) v2(50.57,59.81) v2(50.57,58.26) v2(50.57,56.72) v2(50.57,55.18) v2(50.57,53.63) v2(50.57,52.09) v2(50.57,50.55) v2(50.57,49) v2(50.57,47.46) v2(50.57,45.92) v2(50.6,44.4) v2(50.62,35.71) v2(50.62,34.76) v2(50.62,33.67) v2(50.62,32.14) v2(50.69,30.76) v2(50.85,134.5) v2(50.85,132.95) v2(50.81,131.43) v2(51.17,42.67) v2(51.41,28.14) v2(51.99,30.76) v2(52.93,28.14) v2(52.97,51.62) v2(52.97,49.08) v2(52.97,46.54) v2(52.97,44) v2(53.51,30.76) v2(53.57,23.39) v2(53.57,21.87) v2(53.57,20.35) v2(54.34,19.13) v2(54.76,26.72) v2(54.86,28.05) v2(54.83,25.06) v2(55,44) v2(55.32,30.77) v2(55.86,19.13) v2(56.96,29.98) v2(57.43,28.62) v2(57.43,25.18) v2(57.38,19.13) v2(57.54,44) v2(57.47,26.91) v2(58.73,23.39) v2(58.73,21.87) v2(58.73,20.35) v2(60.08,44) v2(60.08,42.19) v2(60.08,39.65) v2(60.08,37.11) v2(60.08,34.57) v2(60.08,32.03) v2(60.08,29.49) v2(60.08,26.95) v2(60.08,24.41) v2(61.35,21.87) v3(7.86,69.89) v3(7.86,69.06) v3(7.86,68.23) v3(7.86,67.41) v3(7.86,65.75) v3(8.68,69.89) v3(8.68,69.06) v3(8.68,68.23) v3(8.68,67.41) v3(8.68,66.58) v3(8.68,65.75) v3(9.51,69.89) v3(9.51,69.06) v3(9.51,68.23) v3(9.51,67.41) v3(9.51,66.58) v3(9.51,65.75) v3(10.34,69.89) v3(10.34,69.06) v3(10.34,68.23) v3(10.34,67.41) v3(10.34,66.58) v3(10.34,65.75) v3(10.43,60.86) v3(10.43,60.03) v3(10.43,59.2) v3(10.43,58.38) v3(10.43,57.55) v3(10.43,56.72) v3(10.43,55.9) v3(10.43,55.07) v3(10.43,54.24) v3(10.43,53.42) v3(11.17,69.89) v3(11.17,69.06) v3(11.17,68.23) v3(11.17,67.41) v3(11.17,66.58) v3(11.17,65.75) v3(11.26,60.86) v3(11.26,60.03) v3(11.26,59.2) v3(11.26,58.38) v3(11.26,57.55) v3(11.26,56.72) v3(11.26,55.9) v3(11.26,55.07) v3(11.26,54.24) v3(11.26,53.42) v3(12.08,60.86) v3(12.08,60.03) v3(12.08,59.2) v3(12.08,58.38) v3(12.08,57.55) v3(12.08,56.72) v3(12.08,55.9) v3(12.08,55.07) v3(12.08,54.24) v3(12.08,53.42) v3(12.21,66.22) v3(12.91,60.86) v3(12.91,60.03) v3(12.91,59.2) v3(12.91,58.38) v3(12.91,57.55) v3(12.91,56.72) v3(12.91,55.9) v3(12.91,55.07) v3(12.91,54.24) v3(12.91,53.42) v3(13.27,66.23) v3(13.74,60.86) v3(13.74,60.03) v3(13.74,59.2) v3(13.74,58.38) v3(13.74,57.55) v3(13.74,56.72) v3(13.74,55.9) v3(13.74,55.07) v3(13.74,54.24) v3(13.74,53.42) v3(13.91,65.58) v3(14.57,59.2) v3(14.57,58.38) v3(14.57,57.55) v3(14.57,56.72) v3(14.57,55.9) v3(14.57,55.07) v3(14.57,54.24) v3(14.57,53.42) v3(14.74,68.06) v3(14.74,67.23) v3(14.74,66.4) v3(14.74,65.58) v3(15.56,68.06) v3(15.56,67.23) v3(15.56,66.4) v3(15.56,65.58) v3(16.39,68.06) v3(16.39,67.23) v3(16.39,66.4) v3(16.39,65.58) v3(17.61,56.72) v3(17.61,55.9) v3(17.61,55.07) v3(18.44,57.55) v3(18.44,56.72) v3(18.44,55.9) v3(18.44,55.07) v3(19.18,69.71) v3(19.18,68.88) v3(19.18,68.06) v3(19.18,67.23) v3(19.18,66.4) v3(19.18,65.58) v3(19.26,57.55) v3(19.26,56.72) v3(19.26,55.9) v3(19.26,55.07) v3(19.26,54.24) v3(20.01,69.71) v3(20.01,68.88) v3(20.01,68.06) v3(20.01,67.23) v3(20.01,66.4) v3(20.01,65.58) v3(20.09,57.55) v3(20.09,56.72) v3(20.09,55.9) v3(20.09,55.07) v3(20.09,54.24) v3(20.84,69.71) v3(20.84,68.88) v3(20.84,68.06) v3(20.84,67.23) v3(20.84,66.4) v3(20.84,65.58) v3(20.92,57.55) v3(20.92,56.72) v3(20.92,55.9) v3(20.92,55.07) v3(20.92,54.24) v3(21.66,69.71) v3(21.66,68.88) v3(21.66,68.06) v3(21.66,67.23) v3(21.75,57.55) v3(21.75,56.72) v3(21.75,55.9) v3(21.75,55.07) v3(21.75,54.24) v3(22.49,69.71) v3(22.49,68.88) v3(22.49,68.06) v3(22.49,67.23) v3(22.57,57.55) v3(22.57,56.72) v3(22.57,55.9) v3(22.57,55.07) v3(22.57,54.24) v3(23.32,69.71) v3(23.32,68.88) v3(23.32,68.06) v3(23.32,67.23) v3(23.4,57.55) v3(23.4,56.72) v3(23.4,55.9) v3(23.4,55.07) v3(23.4,54.24) v3(24.23,57.55) v3(24.23,56.72) v3(24.23,55.9) v3(24.23,55.07) v3(24.23,54.24) v3(25.05,59.2) v3(25.05,58.38) v3(25.05,57.55) v3(25.05,56.72) v3(25.05,55.9) v3(25.05,55.07) v3(25.05,54.24) v3(25.88,64.99) v3(25.88,64.17) v3(25.88,63.34) v3(25.88,62.51) v3(25.88,61.69) v3(25.88,60.86) v3(25.88,60.03) v3(25.88,59.2) v3(25.88,58.38) v3(25.88,57.55) v3(25.88,56.72) v3(25.88,55.9) v3(25.88,55.07) v3(25.88,54.24) v3(26.71,64.99) v3(26.71,64.17) v3(26.71,63.34) v3(26.71,62.51) v3(26.71,61.69) v3(26.71,60.86) v3(26.71,60.03) v3(26.71,59.2) v3(26.71,58.38) v3(26.71,57.55) v3(26.71,56.72) v3(26.71,55.9) v3(26.71,55.07) v3(26.71,54.24) v3(28.46,69.71) v3(28.46,68.88) v3(28.46,68.06) v3(28.46,67.23) v3(28.46,66.4) v3(28.46,65.58) v3(29.28,69.71) v3(29.28,68.88) v3(29.28,68.06) v3(29.28,67.23) v3(29.28,66.4) v3(30.11,69.71) v3(30.11,68.88) v3(30.11,68.06) v3(30.11,67.23) v3(30.11,66.4) v3(30.13,65.57) v3(30.75,60.86) v3(30.75,60.03) v3(30.75,59.2) v3(30.75,58.38) v3(30.75,57.55) v3(30.75,56.72) v3(30.75,55.9) v3(30.75,55.07) v3(30.75,54.24) v3(30.94,69.71) v3(30.94,68.88) v3(30.94,68.06) v3(30.94,67.23) v3(30.94,66.4) v3(30.96,65.57) v3(31.58,60.86) v3(31.58,60.03) v3(31.58,59.2) v3(31.58,58.38) v3(31.58,57.55) v3(31.58,56.72) v3(31.58,55.9) v3(31.58,55.07) v3(31.58,54.24) v3(31.77,69.71) v3(31.77,68.88) v3(31.77,68.06) v3(31.77,67.23) v3(31.77,66.4) v3(32.4,60.86) v3(32.4,60.03) v3(32.4,59.2) v3(32.4,58.38) v3(32.4,57.55) v3(32.4,56.72) v3(32.4,55.9) v3(32.4,55.07) v3(32.4,54.24) v3(32.59,69.71) v3(32.59,68.88) v3(32.59,68.06) v3(32.59,67.23) v3(32.59,66.4) v3(33.23,60.86) v3(33.23,60.03) v3(33.23,59.2) v3(33.23,58.38) v3(33.23,57.55) v3(33.23,56.72) v3(33.23,55.9) v3(33.23,55.07) v3(33.23,54.24) v3(33.42,69.71) v3(33.42,68.88) v3(33.42,68.06) v3(33.42,67.23) v3(33.42,66.4) v3(34.06,60.86) v3(34.06,60.03) v3(34.06,59.2) v3(34.06,58.38) v3(34.06,57.55) v3(34.06,56.72) v3(34.06,55.9) v3(34.06,55.07) v3(34.06,54.24) v3(34.25,69.71) v3(34.25,68.88) v3(34.25,68.06) v3(34.25,67.23) v3(34.25,66.4) v3(34.25,65.58) v3(34.89,59.2) v3(34.89,58.38) v3(34.89,57.55) v3(34.89,56.72) v3(34.89,55.9) v3(34.89,55.07) v3(34.89,54.24) v3(35.07,69.71) v3(35.07,68.88) v3(35.07,68.06) v3(35.07,67.23) v3(35.07,66.4) v3(35.07,65.58) v3(35.9,68.06) v3(35.9,67.23) v3(35.9,66.4) v3(35.9,65.58) v3(36.73,68.06) v3(36.73,67.23) v3(36.73,66.4) v3(36.73,65.58) v3(37.93,57.55) v3(37.93,56.72) v3(37.93,55.9) v3(37.93,55.07) v3(38.76,57.55) v3(38.76,56.72) v3(38.76,55.9) v3(38.76,55.07) v3(39.39,69.97) v3(39.39,69.14) v3(39.39,68.31) v3(39.39,67.49) v3(39.39,66.66) v3(39.39,65.83) v3(39.58,57.55) v3(39.58,56.72) v3(39.58,55.9) v3(39.58,55.07) v3(39.58,54.24) v3(40.22,69.97) v3(40.22,69.14) v3(40.22,68.31) v3(40.22,67.49) v3(40.22,66.66) v3(40.22,65.83) v3(40.41,57.55) v3(40.41,56.72) v3(40.41,55.9) v3(40.41,55.07) v3(40.41,54.24) v3(41.05,69.97) v3(41.05,69.14) v3(41.05,68.31) v3(41.05,67.49) v3(41.24,57.55) v3(41.24,56.72) v3(41.24,55.9) v3(41.24,55.07) v3(41.24,54.24) v3(42.07,57.55) v3(42.07,56.72) v3(42.07,55.9) v3(42.07,55.07) v3(42.07,54.24) v3(42.89,57.55) v3(42.89,56.72) v3(42.89,55.9) v3(42.89,55.07) v3(42.89,54.24) v3(43.72,57.55) v3(43.72,56.72) v3(43.72,55.9) v3(43.72,55.07) v3(43.72,54.24) v3(44.55,57.55) v3(44.55,56.72) v3(44.55,55.9) v3(44.55,55.07) v3(44.55,54.24) v3(45.37,59.2) v3(45.37,58.38) v3(45.37,57.55) v3(45.37,56.72) v3(45.37,55.9) v3(45.37,55.07) v3(45.37,54.24) v3(46.2,64.99) v3(46.2,64.17) v3(46.2,63.34) v3(46.2,62.51) v3(46.2,61.69) v3(46.2,60.86) v3(46.2,60.03) v3(46.2,59.2) v3(46.2,58.38) v3(46.2,57.55) v3(46.2,56.72) v3(46.2,55.9) v3(46.2,55.07) v3(46.2,54.24) v3(47.03,64.99) v3(47.03,64.17) v3(47.03,63.34) v3(47.03,62.51) v3(47.03,61.69) v3(47.03,60.86) v3(47.03,60.03) v3(47.03,59.2) v3(47.03,58.38) v3(47.03,57.55) v3(47.03,56.72) v3(47.03,55.9) v3(47.03,55.07) v3(47.03,54.24)
